# EAGLE board pcbproto- (EAGLE 4.11), part 1 of 4
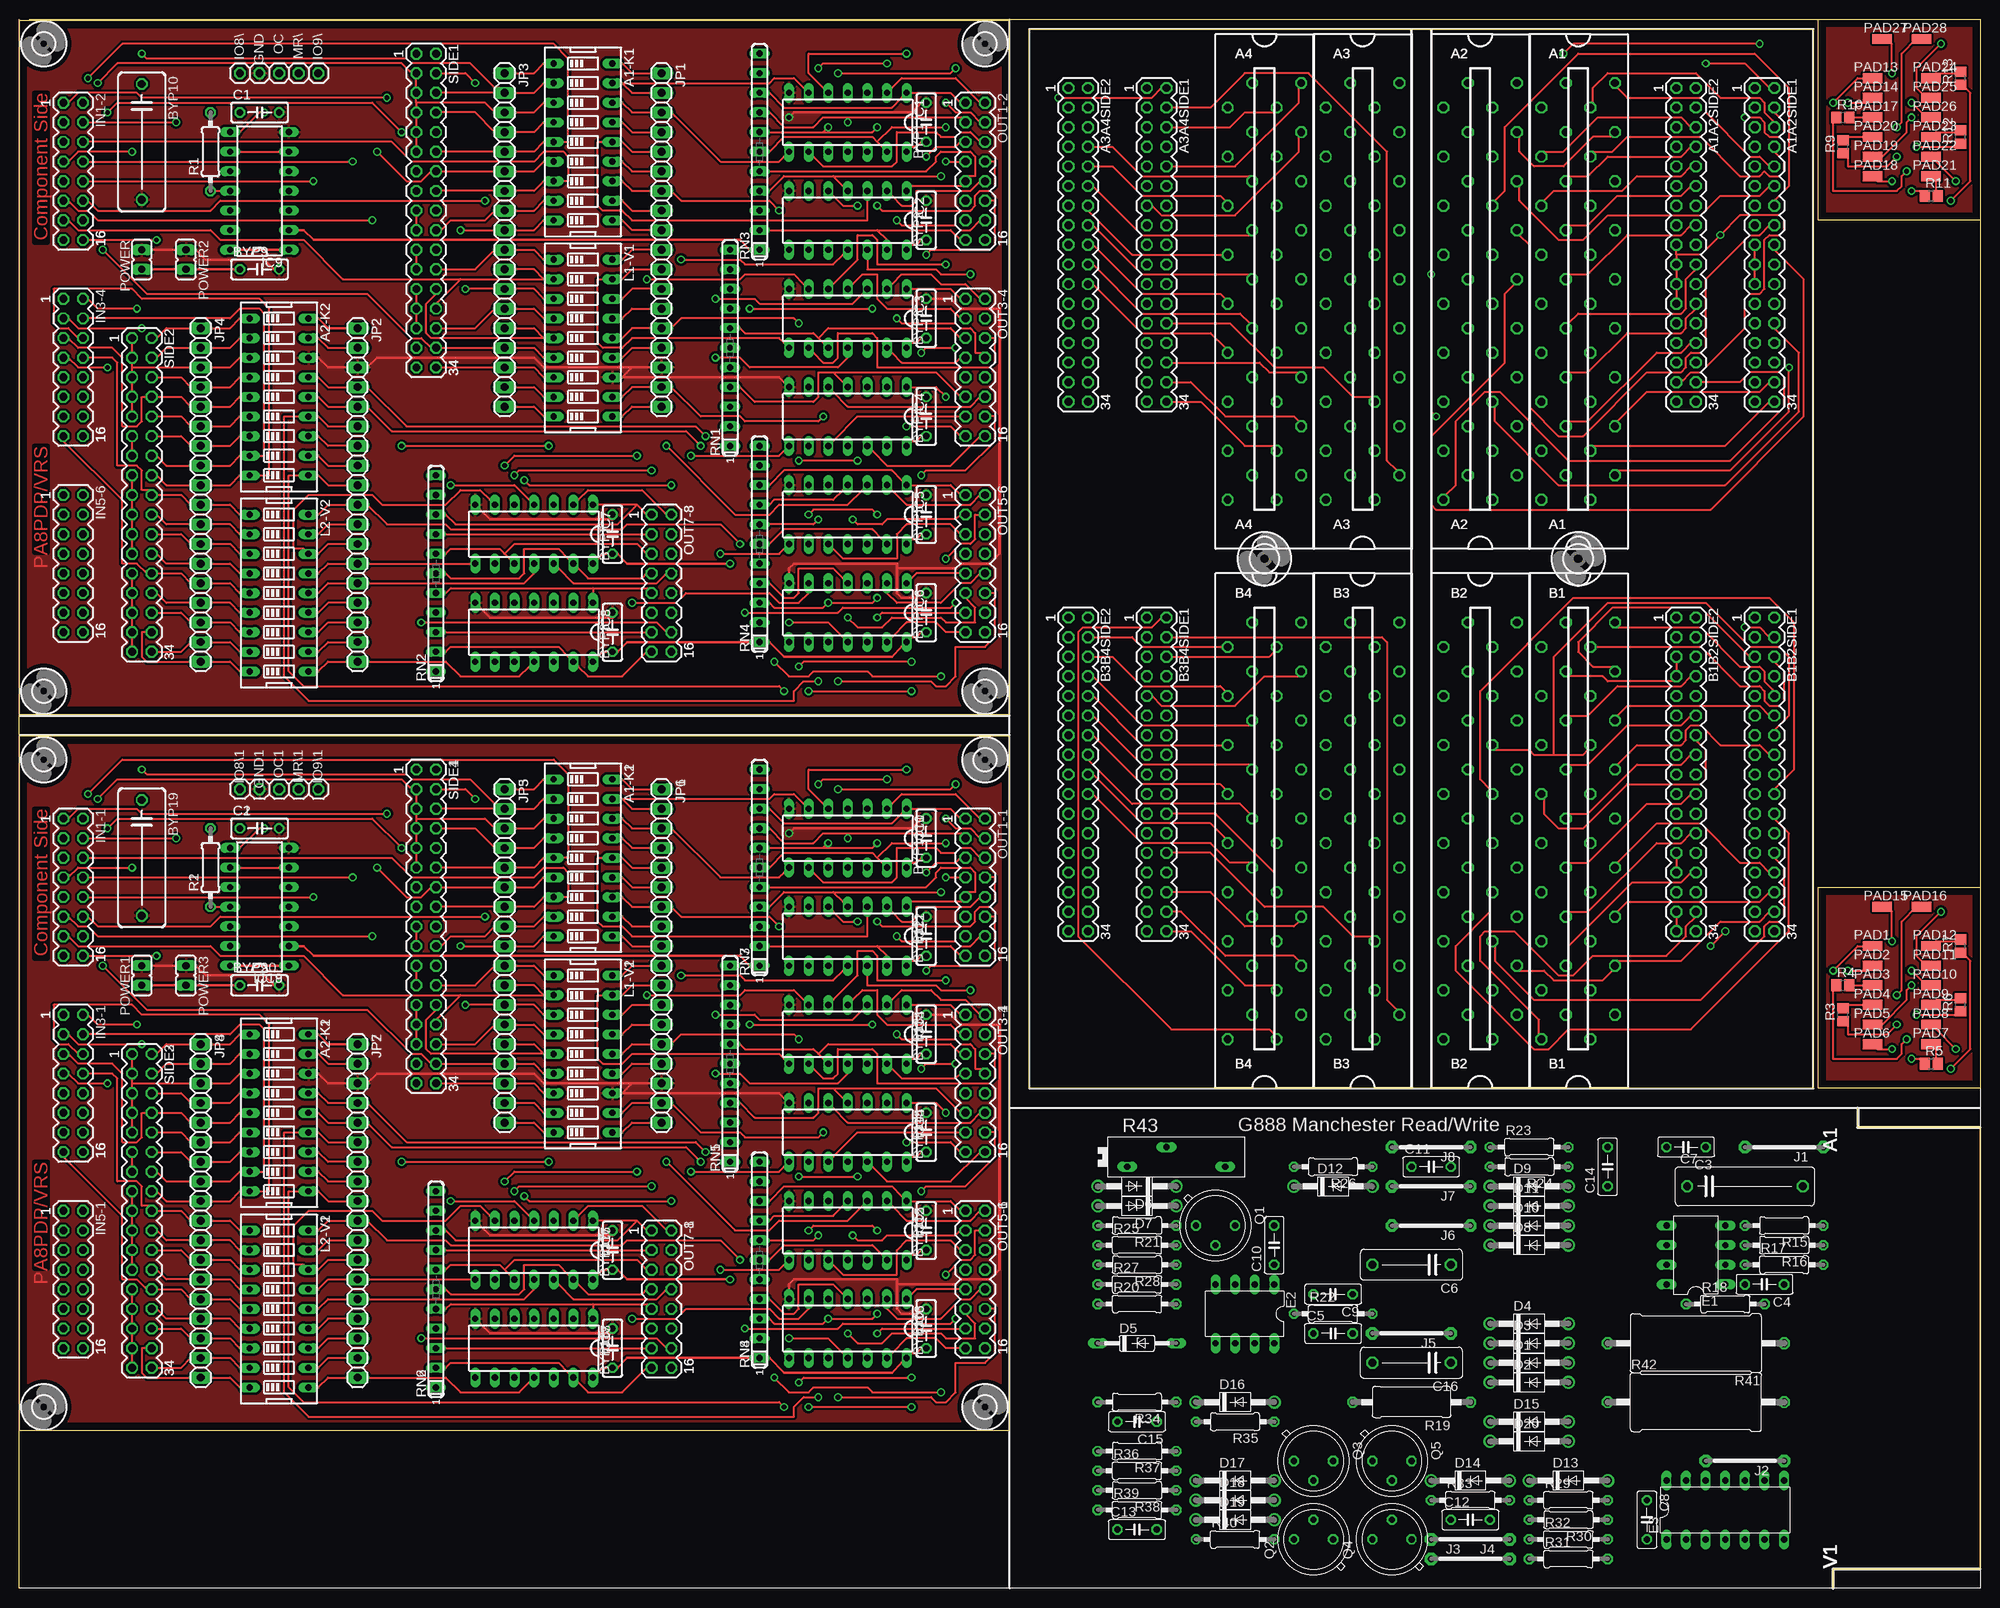
[diagram p0: board, top side]
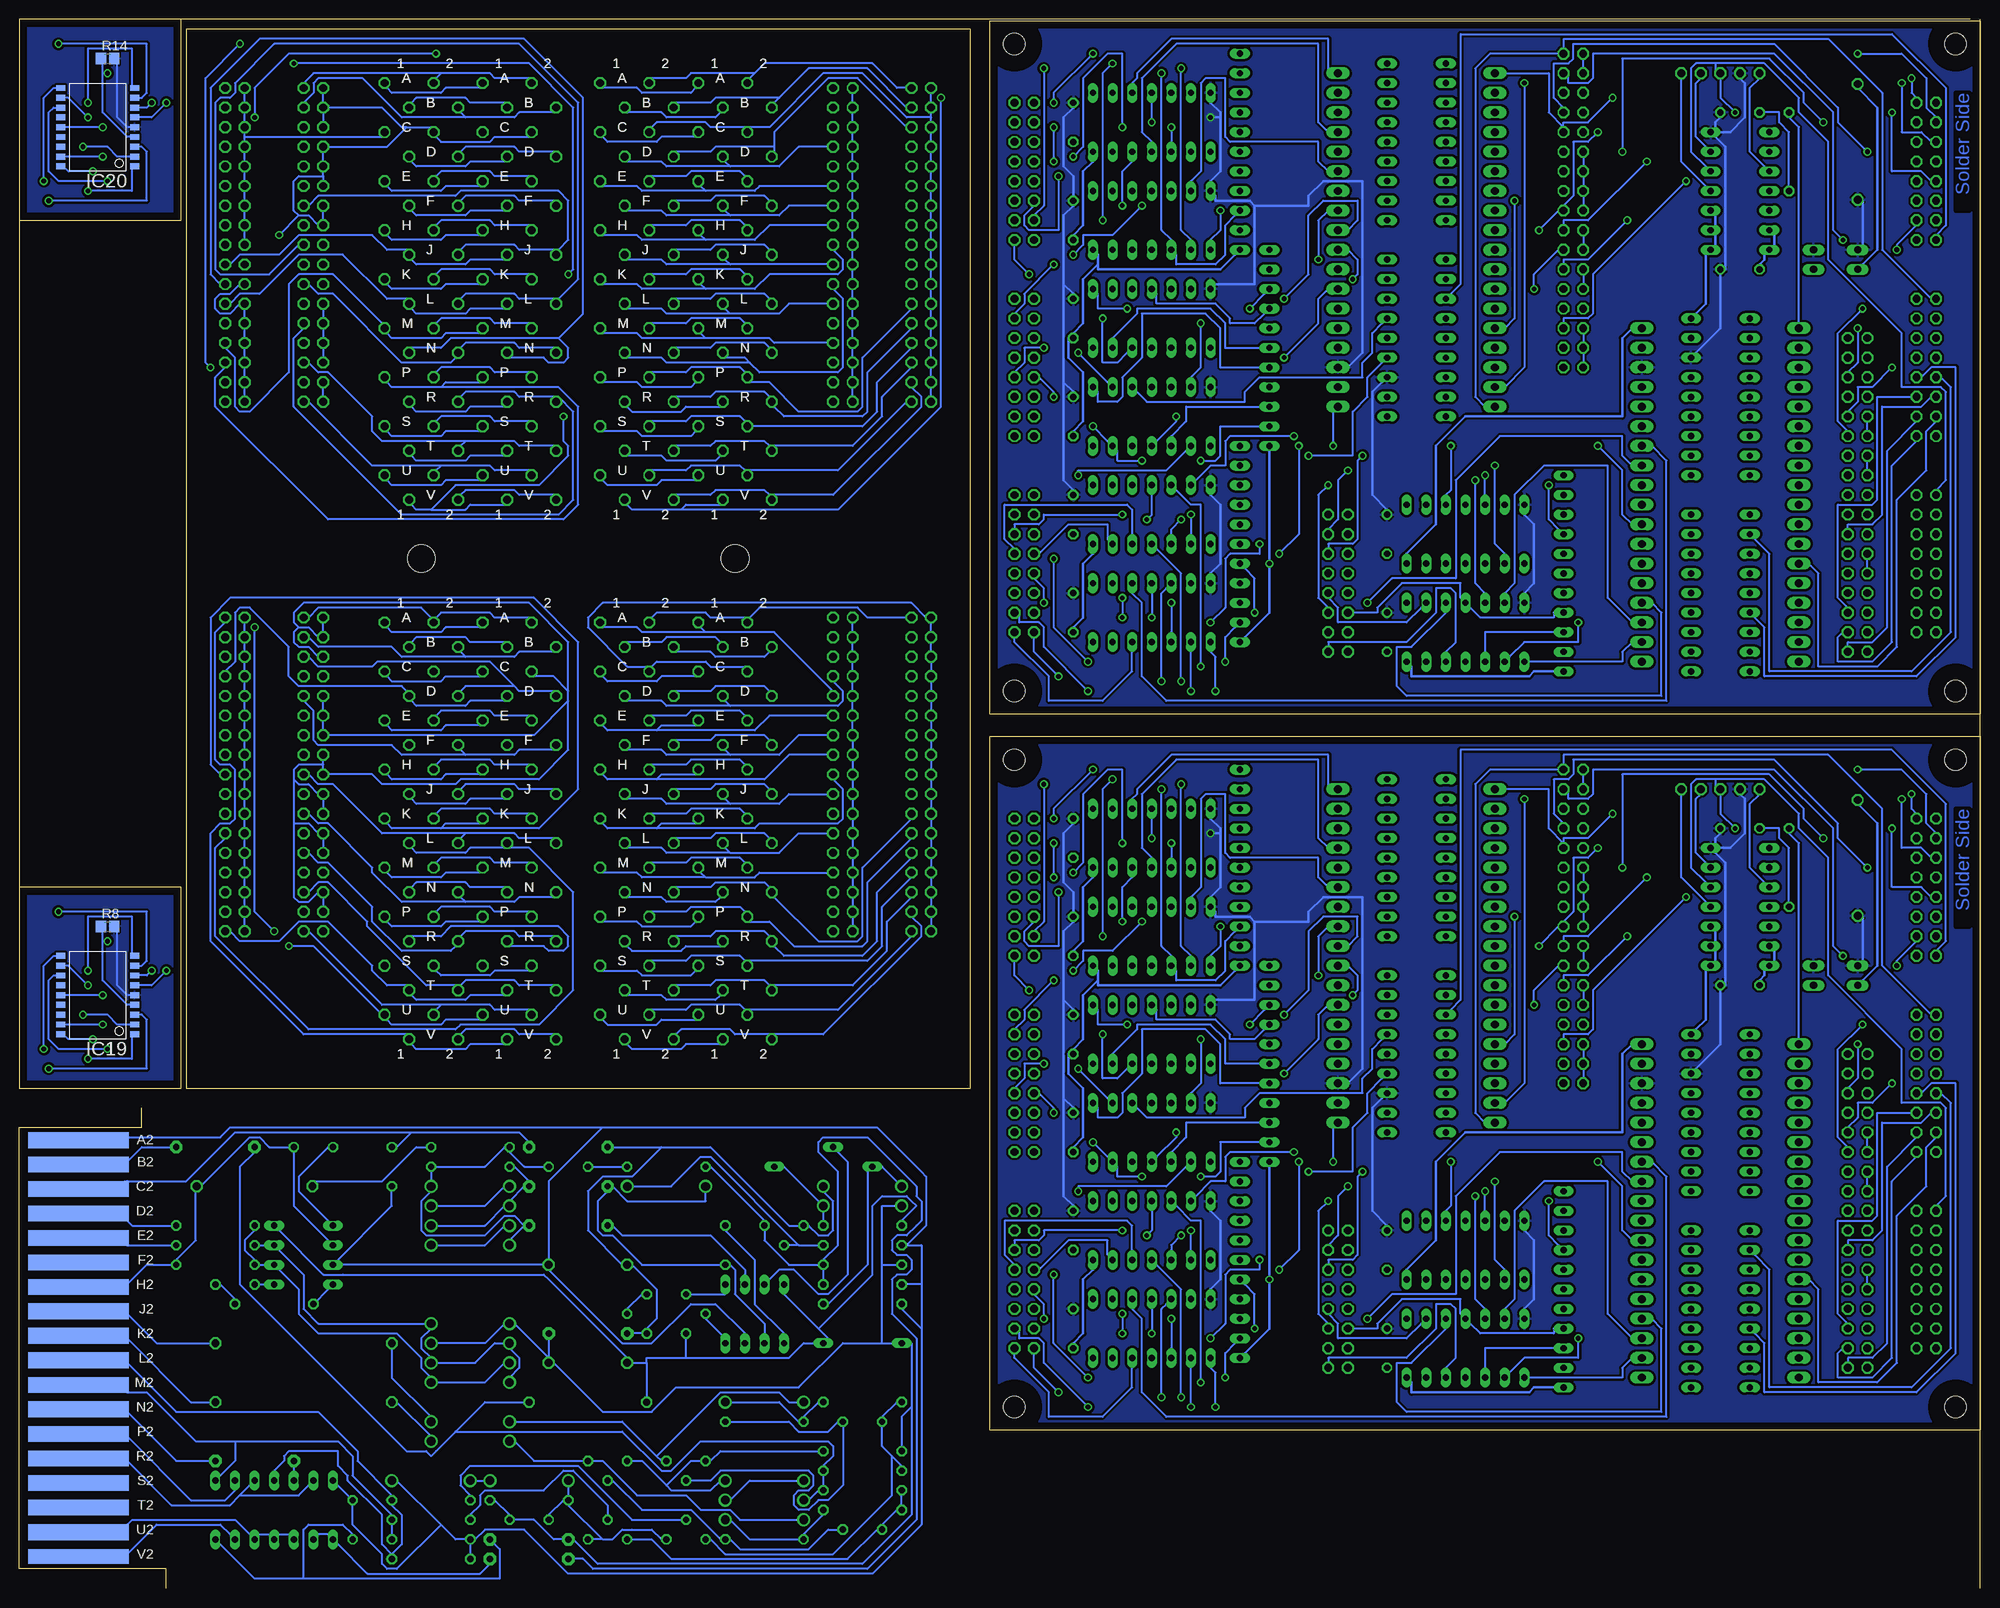
[diagram p1: board, bottom side, seen from below]

Size 254 x 203.2 mm. Coordinates in mm from the lower left corner, seen from the top.
Outline: 128.26,203.03 0.01,203.03
Outline: 0.01,203.03 0.01,113.19
Outline: 0.01,113.19 128.26,113.19
Outline: 128.26,113.19 128.26,203.03
Outline: 1.27,203.2 233.04,203.2
Outline: 233.04,203.2 254,203.2
Outline: 254,203.2 254,177.16
Outline: 254,177.16 254,90.81
Outline: 0,0 0,203.2
Outline: 128.26,110.33 0.01,110.33
Outline: 0.01,110.33 0.01,20.48
Outline: 0.01,20.48 128.26,20.48
Outline: 128.26,20.48 128.26,110.33
Outline: 232.41,64.77 182.88,64.77
Outline: 182.88,64.77 180.34,64.77
Outline: 180.34,64.77 130.81,64.77
Outline: 130.81,64.77 130.81,201.93
Outline: 130.81,201.93 180.34,201.93
Outline: 180.34,201.93 182.88,201.93
Outline: 182.88,201.93 232.41,201.93
Outline: 232.41,201.93 232.41,64.77
Outline: 232.41,64.77 182.88,64.77
Outline: 182.88,64.77 180.34,64.77
Outline: 180.34,64.77 130.81,64.77
Outline: 130.81,64.77 130.81,201.93
Outline: 130.81,201.93 180.34,201.93
Outline: 180.34,201.93 182.88,201.93
Outline: 182.88,201.93 232.41,201.93
Outline: 232.41,201.93 232.41,64.77
Outline: 128.26,203.03 0.01,203.03
Outline: 0.01,203.03 0.01,113.19
Outline: 0.01,113.19 128.26,113.19
Outline: 128.26,113.19 128.26,203.03
Outline: 128.26,110.33 0.01,110.33
Outline: 0.01,110.33 0.01,20.48
Outline: 0.01,20.48 128.26,20.48
Outline: 128.26,20.48 128.26,110.33
Outline: 233.04,64.77 233.04,90.81
Outline: 233.04,90.81 254,90.81
Outline: 254,90.81 254,66.04 254,64.77
Outline: 254,64.77 233.04,64.77
Outline: 233.04,177.16 233.04,203.2
Outline: 233.04,203.2 254,203.2
Outline: 254,203.2 254,179.07 254,177.16
Outline: 254,177.16 233.04,177.16
Outline: 232.41,64.77 182.88,64.77
Outline: 182.88,64.77 180.34,64.77
Outline: 180.34,64.77 130.81,64.77
Outline: 130.81,64.77 130.81,201.93
Outline: 130.81,201.93 180.34,201.93
Outline: 180.34,201.93 182.88,201.93
Outline: 182.88,201.93 232.41,201.93
Outline: 232.41,201.93 232.41,64.77
Outline: 128.26,203.03 0.01,203.03
Outline: 0.01,203.03 0.01,113.19
Outline: 0.01,113.19 128.26,113.19
Outline: 128.26,113.19 128.26,203.03
Outline: 128.26,110.33 0.01,110.33
Outline: 0.01,110.33 0.01,20.48
Outline: 0.01,20.48 128.26,20.48
Outline: 128.26,20.48 128.26,110.33
Outline: 233.04,64.77 233.04,90.81
Outline: 233.04,90.81 254,90.81
Outline: 254,90.81 254,64.77
Outline: 254,64.77 233.04,64.77
Outline: 233.04,177.16 233.04,203.2
Outline: 233.04,203.2 254,203.2
Outline: 254,203.2 254,177.16
Outline: 254,177.16 233.04,177.16
Copper layers (1*16): Top 0.035mm / dielectric 1.5mm / Bottom 0.035mm
Design rules "custompcb": minimum track width 10mil, minimum drill 24mil, track to track 12mil, track to pad 12mil, pad to pad 12mil, via to via 12mil, smd to smd 12mil, copper to edge 40mil, drill to drill 12mil, minimum pad ring 10mil, minimum via ring 8mil, stop-mask expansion 0mil, vias tented up to drill 0mil, thermal gap 10mil
Net classes: 1 Power: width 0.305 mm, drill 0.305 mm

## Footprints (pad centres in the part's own frame; a part is rotated, then mirrored left to right if it is on the bottom)
H807 = drill 1.016 octagon: A1 4.763,28.575; A2 -1.587,28.575; B1 1.587,25.4; B2 -4.763,25.4; C1 4.763,22.225; C2 -1.587,22.225; D1 1.587,19.05; D2 -4.763,19.05; E1 4.763,15.875; E2 -1.587,15.875; F1 1.587,12.7; F2 -4.763,12.7; H1 4.763,9.525; H2 -1.587,9.525; J1 1.587,6.35; J2 -4.763,6.35; K1 4.763,3.175; K2 -1.587,3.175; L1 1.587,0; L2 -4.763,0; M1 4.763,-3.175; M2 -1.587,-3.175; N1 1.587,-6.35; N2 -4.763,-6.35; P1 4.763,-9.525; P2 -1.587,-9.525; R1 1.587,-12.7; R2 -4.763,-12.7; S1 4.763,-15.875; S2 -1.587,-15.875; T1 1.587,-19.05; T2 -4.763,-19.05; U1 4.763,-22.225; U2 -1.587,-22.225; V1 1.587,-25.4; V2 -4.763,-25.4
EDG-09 = drill 0.813 long: 1 -10.16,-3.81; 2 -7.62,-3.81; 3 -5.08,-3.81; 4 -2.54,-3.81; 5 0,-3.81; 6 2.54,-3.81; 7 5.08,-3.81; 8 7.62,-3.81; 9 10.16,-3.81; 10 10.16,3.81; 11 7.62,3.81; 12 5.08,3.81; 13 2.54,3.81; 14 0,3.81; 15 -2.54,3.81; 16 -5.08,3.81; 17 -7.62,3.81; 18 -10.16,3.81
MA17-2 = drill 1.016 octagon: 1 -20.32,-1.27; 2 -20.32,1.27; 3 -17.78,-1.27; 4 -17.78,1.27; 5 -15.24,-1.27; 6 -15.24,1.27; 7 -12.7,-1.27; 8 -12.7,1.27; 9 -10.16,-1.27; 10 -10.16,1.27; 11 -7.62,-1.27; 12 -7.62,1.27; 13 -5.08,-1.27; 14 -5.08,1.27; 15 -2.54,-1.27; 16 -2.54,1.27; 17 0,-1.27; 18 0,1.27; 19 2.54,-1.27; 20 2.54,1.27; 21 5.08,-1.27; 22 5.08,1.27; 23 7.62,-1.27; 24 7.62,1.27; 25 10.16,-1.27; 26 10.16,1.27; 27 12.7,-1.27; 28 12.7,1.27; 29 15.24,-1.27; 30 15.24,1.27; 31 17.78,-1.27; 32 17.78,1.27; 33 20.32,-1.27; 34 20.32,1.27
C050-025X075 = drill 0.813 octagon: 1 -2.54,0; 2 2.54,0
C150-064X183 = drill 1.016 octagon: 1 -7.493,0; 2 7.493,0
C102-043X133 = drill 1.016 octagon: 1 -5.08,0; 2 5.08,0
C150-054X183 = drill 1.016 octagon: 1 -7.493,0; 2 7.493,0
DO41-10 = drill 1.118 round: A 5.08,0; C -5.08,0
DO35Z10 = drill 0.813 long: A 5.08,0; C -5.08,0
DIL08 = drill 0.813 long: 1 -3.81,-3.81; 2 -1.27,-3.81; 3 1.27,-3.81; 4 3.81,-3.81; 5 3.81,3.81; 6 1.27,3.81; 7 -1.27,3.81; 8 -3.81,3.81
DIL14 = drill 0.813 long: 1 -7.62,-3.81; 2 -5.08,-3.81; 3 -2.54,-3.81; 4 0,-3.81; 5 2.54,-3.81; 6 5.08,-3.81; 7 7.62,-3.81; 8 7.62,3.81; 9 5.08,3.81; 10 2.54,3.81; 11 0,3.81; 12 -2.54,3.81; 13 -5.08,3.81; 14 -7.62,3.81
1X01 = drill 1.016 octagon: 1 0,0
SO-18W = smd 0.762 x 1.143: 1 -5.08,-4.788; 2 -3.81,-4.788; 3 -2.54,-4.788; 4 -1.27,-4.788; 5 0,-4.788; 6 1.27,-4.788; 7 2.54,-4.788; 8 3.81,-4.788; 9 5.08,-4.788; 10 5.08,4.788; 11 3.81,4.788; 12 2.54,4.788; 13 1.27,4.788; 14 0,4.788; 15 -1.27,4.788; 16 -2.54,4.788; 17 -3.81,4.788; 18 -5.08,4.788
MA08-2 = drill 1.016 octagon: 1 -8.89,-1.27; 2 -8.89,1.27; 3 -6.35,-1.27; 4 -6.35,1.27; 5 -3.81,-1.27; 6 -3.81,1.27; 7 -1.27,-1.27; 8 -1.27,1.27; 9 1.27,-1.27; 10 1.27,1.27; 11 3.81,-1.27; 12 3.81,1.27; 13 6.35,-1.27; 14 6.35,1.27; 15 8.89,-1.27; 16 8.89,1.27
10 = drill 0.813 pad 1.6 octagon: 1 -5.08,0; 2 5.08,0
1X18 = drill 1.016 long: 1 -21.59,0; 2 -19.05,0; 3 -16.51,0; 4 -13.97,0; 5 -11.43,0; 6 -8.89,0; 7 -6.35,0; 8 -3.81,0; 9 -1.27,0; 10 1.27,0; 11 3.81,0; 12 6.35,0; 13 8.89,0; 14 11.43,0; 15 13.97,0; 16 16.51,0; 17 19.05,0; 18 21.59,0
SMD2 = smd 1.27 x 2.54: 1 0,0
JP1 = drill 0.914 long: 1 0,-1.27; 2 0,1.27
TO39 = drill 0.813 octagon: 1 0,-2.54; 2 2.54,0; 3 0,2.54
0207/10 = drill 0.813 octagon: 1 -5.08,0; 2 5.08,0
R0805 = smd 1.3 x 1.5: 1 -0.85,0; 2 0.85,0
0411/15 = drill 0.914 octagon: 1 -7.62,0; 2 7.62,0
P0817/22 = drill 1.016 octagon: 1 -11.43,0; 2 11.43,0
PT-SPIN = drill 0.813 long: A -6.35,-1.27; E 6.35,-1.27; S -1.27,1.27
SIL11 = drill 0.813 long: 1 -12.7,0; 2 -10.16,0; 3 -7.62,0; 4 -5.08,0; 5 -2.54,0; 6 0,0; 7 2.54,0; 8 5.08,0; 9 7.62,0; 10 10.16,0; 11 12.7,0
2,8 = hole 2.8: 0,0
3,6 = hole 3.6: 0,0
EDGE-CON1 = smd 13.017 x 2.032 bottom: A2 7.69,4.194; B2 7.668,7.328; C2 7.668,10.49; D2 7.693,13.665; E2 7.693,16.84; F2 7.642,20.041; H2 7.642,23.19; J2 7.668,26.34; K2 7.668,29.515; L2 7.693,32.69; M2 7.693,35.89; N2 7.693,39.04; P2 7.668,42.24; R2 7.668,45.39; S2 7.693,48.565; T2 7.693,51.74; U2 7.693,54.966 | smd 13.017 x 1.905 bottom: V2 7.668,58.102

## Placement (x,y rotation side)
A1  [H807]  201.93,166.37 0 top
A1-K1  A1-K1  [EDG-09]  73.03,187.32 270 top
A1-K2  A1-K1  [EDG-09]  73.03,94.61 270 top
A1A2SIDE1  [MA17-2]  226.06,173.99 270 top
A1A2SIDE2  [MA17-2]  215.9,173.99 270 top
A2  [H807]  189.23,166.37 0 top
A2-K1  A2-K2  [EDG-09]  33.66,61.59 270 top
A2-K2  A2-K2  [EDG-09]  33.66,154.31 270 top
A3  [H807]  173.99,166.37 0 top
A3A4SIDE1  [MA17-2]  147.32,173.99 270 top
A3A4SIDE2  [MA17-2]  137.16,173.99 270 top
A4  [H807]  161.29,166.37 0 top
B1  [H807]  201.93,96.52 0 top
B1B2SIDE1  [MA17-2]  226.06,105.41 270 top
B1B2SIDE2  [MA17-2]  215.9,105.41 270 top
B2  [H807]  189.23,96.52 0 top
B3  [H807]  173.99,96.52 0 top
B3B4SIDE1  [MA17-2]  147.32,105.41 270 top
B3B4SIDE2  [MA17-2]  137.16,105.41 270 top
B4  [H807]  161.29,96.52 0 top
BYP1  0.1uf  [C050-025X075]  117.47,189.87 90 top
BYP2  0.1uf  [C050-025X075]  117.47,177.16 90 top
BYP3  0.1uf  [C050-025X075]  117.47,164.47 90 top
BYP4  0.1uf  [C050-025X075]  117.47,151.76 90 top
BYP5  0.1uf  [C050-025X075]  117.47,139.06 90 top
BYP6  0.1uf  [C050-025X075]  117.47,126.36 90 top
BYP7  0.1uf  [C050-025X075]  76.83,136.53 90 top
BYP8  0.1uf  [C050-025X075]  76.83,123.83 90 top
BYP9  0.1uf  [C050-025X075]  31.11,170.81 0 top
BYP10  100uf 25V  [C150-064X183]  15.88,187.32 270 top
BYP11  0.1uf  [C050-025X075]  117.47,97.16 90 top
BYP12  0.1uf  [C050-025X075]  117.47,84.45 90 top
BYP13  0.1uf  [C050-025X075]  117.47,71.75 90 top
BYP14  0.1uf  [C050-025X075]  117.47,59.05 90 top
BYP15  0.1uf  [C050-025X075]  117.47,46.35 90 top
BYP16  0.1uf  [C050-025X075]  117.47,33.66 90 top
BYP17  0.1uf  [C050-025X075]  76.83,43.81 90 top
BYP18  0.1uf  [C050-025X075]  76.83,31.11 90 top
BYP19  100uf 25V  [C150-064X183]  15.88,94.61 270 top
BYP20  0.1uf  [C050-025X075]  31.11,78.11 0 top
C1  0.1uf  [C050-025X075]  31.11,191.13 0 top
C2  0.1uf  [C050-025X075]  31.11,98.42 0 top
C3  .01uf  [C050-025X075]  215.9,57.15 180 top
C4  .22uf  [C050-025X075]  226.06,39.37 180 top
C5  .01uf  [C050-025X075]  170.18,33.02 0 top
C6  6.8uf 35V  [C102-043X133]  180.34,41.91 180 top
C7  .01uf MYLAR 10%  [C150-054X183]  223.52,52.07 0 top
C8  .01uf  [C050-025X075]  210.82,8.89 270 top
C9  .22uf  [C050-025X075]  170.18,38.1 180 top
C10  .01uf  [C050-025X075]  162.56,44.45 90 top
C11  .01uf  [C050-025X075]  182.88,54.61 0 top
C12  .01uf  [C050-025X075]  187.96,8.89 0 top
C13  .1uf  [C050-025X075]  144.78,7.62 0 top
C14  .01uf  [C050-025X075]  205.74,54.61 90 top
C15  .1uf  [C050-025X075]  144.78,21.59 180 top
C16  6.8uf 35V  [C102-043X133]  180.34,29.21 180 top
D1  1N3606  [DO41-10]  195.58,29.21 0 top
D2  1N3606  [DO41-10]  195.58,26.67 0 top
D3  1N3606  [DO41-10]  195.58,31.75 0 top
D4  1N3606  [DO41-10]  195.58,34.29 0 top
D5  1N753A  [DO35Z10]  144.78,31.75 0 top
D6  1N645  [DO41-10]  144.78,52.07 180 top
D7  1N645  [DO41-10]  144.78,49.53 180 top
D8  1N3606  [DO41-10]  195.58,44.45 0 top
D9  1N3606  [DO41-10]  195.58,52.07 0 top
D10  1N3606  [DO41-10]  195.58,46.99 0 top
D11  1N3606  [DO41-10]  195.58,49.53 0 top
D12  1N3606  [DO41-10]  170.18,52.07 0 top
D13  1N645  [DO41-10]  200.66,13.97 0 top
D14  1N645  [DO41-10]  187.96,13.97 0 top
D15  D670  [DO41-10]  195.58,21.59 0 top
D16  D670  [DO41-10]  157.48,24.13 0 top
D17  1N645  [DO41-10]  157.48,13.97 0 top
D18  1N645  [DO41-10]  157.48,11.43 0 top
D19  D670  [DO41-10]  157.48,8.89 0 top
D20  D670  [DO41-10]  195.58,19.05 0 top
E1  MC1709  [DIL08]  217.17,43.18 90 top
E2  MC1709  [DIL08]  158.75,35.56 180 top
E3  7400N  [DIL14]  220.98,10.16 0 top
GND  GND  [1X01]  31.11,196.22 0 top
GND1  GND  [1X01]  31.11,103.5 0 top
IC1  74LS125N  [DIL14]  107.31,189.87 180 top
IC2  74LS125N  [DIL14]  107.31,177.16 180 top
IC3  74LS125N  [DIL14]  107.31,164.47 180 top
IC4  74LS125N  [DIL14]  107.31,151.76 180 top
IC5  74LS125N  [DIL14]  107.31,139.06 180 top
IC6  74LS125N  [DIL14]  107.31,126.36 180 top
IC7  74LS125N  [DIL14]  66.67,136.53 180 top
IC8  74LS125N  [DIL14]  66.67,123.83 180 top
IC9  74LS10N  [DIL14]  31.11,180.97 90 top
IC10  74LS125N  [DIL14]  107.31,97.16 180 top
IC11  74LS125N  [DIL14]  107.31,84.45 180 top
IC12  74LS125N  [DIL14]  107.31,46.35 180 top
IC13  74LS125N  [DIL14]  107.31,33.66 180 top
IC14  74LS125N  [DIL14]  107.31,71.75 180 top
IC15  74LS125N  [DIL14]  107.31,59.05 180 top
IC16  74LS125N  [DIL14]  66.67,43.81 180 top
IC17  74LS125N  [DIL14]  66.67,31.11 180 top
IC18  74LS10N  [DIL14]  31.11,88.27 90 top
IC19  PIC16F627SO  [SO-18W]  243.84,76.83 90 bottom
IC20  PIC16F627SO  [SO-18W]  243.84,189.23 90 bottom
IN1-1  [MA08-2]  6.99,90.81 270 top
IN1-2  [MA08-2]  6.99,183.51 270 top
IN3-1  [MA08-2]  6.99,65.41 270 top
IN3-4  [MA08-2]  6.99,158.12 270 top
IN5-1  [MA08-2]  6.99,40.01 270 top
IN5-6  [MA08-2]  6.99,132.72 270 top
IO8\  IO8\  [1X01]  28.57,196.22 0 top
IO8\1  IO8\  [1X01]  28.57,103.5 0 top
IO9\  IO9\  [1X01]  38.73,196.22 0 top
IO9\1  IO9\  [1X01]  38.73,103.5 0 top
J1  J10MM  [10]  228.6,57.15 180 top
J2  J10MM  [10]  223.52,16.51 180 top
J3  J10MM  [10]  187.96,3.81 0 top
J4  J10MM  [10]  187.96,6.35 180 top
J5  J10MM  [10]  180.34,33.02 180 top
J6  J10MM  [10]  182.88,46.99 180 top
J7  J10MM  [10]  182.88,52.07 180 top
J8  J10MM  [10]  182.88,57.15 180 top
JP1  [1X18]  83.19,174.62 270 top
JP2  [1X18]  43.81,141.6 270 top
JP3  [1X18]  62.87,174.62 270 top
JP4  [1X18]  23.5,141.6 270 top
JP5  [1X18]  62.87,81.92 270 top
JP6  [1X18]  83.19,81.92 270 top
JP7  [1X18]  43.81,48.9 270 top
JP8  [1X18]  23.5,48.9 270 top
L1-V1  L1-V1  [EDG-09]  73.03,161.93 270 top
L1-V2  L1-V1  [EDG-09]  73.03,69.22 270 top
L2-V1  L2-V2  [EDG-09]  33.66,36.2 270 top
L2-V2  L2-V2  [EDG-09]  33.66,128.91 270 top
MR\  MR\  [1X01]  36.2,196.22 0 top
MR\1  MR\  [1X01]  36.2,103.5 0 top
OC  OC  [1X01]  33.66,196.22 0 top
OC1  OC  [1X01]  33.66,103.5 0 top
OUT1-1  [MA08-2]  123.83,90.81 270 top
OUT1-2  [MA08-2]  123.83,183.51 270 top
OUT3-1  [MA08-2]  123.83,65.41 270 top
OUT3-4  [MA08-2]  123.83,158.12 270 top
OUT5-1  [MA08-2]  123.83,40.01 270 top
OUT5-6  [MA08-2]  123.83,132.72 270 top
OUT7-1  [MA08-2]  83.19,37.47 270 top
OUT7-8  [MA08-2]  83.19,130.18 270 top
PAD1  [SMD2]  240.03,83.19 270 top
PAD2  [SMD2]  240.03,80.64 270 top
PAD3  [SMD2]  240.03,78.11 270 top
PAD4  [SMD2]  240.03,75.56 270 top
PAD5  [SMD2]  240.03,73.03 270 top
PAD6  [SMD2]  240.03,70.48 270 top
PAD7  [SMD2]  247.65,70.48 270 top
PAD8  [SMD2]  247.65,73.03 270 top
PAD9  [SMD2]  247.65,75.56 270 top
PAD10  [SMD2]  247.65,78.11 270 top
PAD11  [SMD2]  247.65,80.64 270 top
PAD12  [SMD2]  247.65,83.19 270 top
PAD13  [SMD2]  240.03,195.58 270 top
PAD14  [SMD2]  240.03,193.04 270 top
PAD15  [SMD2]  241.3,88.27 270 top
PAD16  [SMD2]  246.38,88.27 270 top
PAD17  [SMD2]  240.03,190.5 270 top
PAD18  [SMD2]  240.03,182.88 270 top
PAD19  [SMD2]  240.03,185.42 270 top
PAD20  [SMD2]  240.03,187.96 270 top
PAD21  [SMD2]  247.65,182.88 270 top
PAD22  [SMD2]  247.65,185.42 270 top
PAD23  [SMD2]  247.65,187.96 270 top
PAD24  [SMD2]  247.65,195.58 270 top
PAD25  [SMD2]  247.65,193.04 270 top
PAD26  [SMD2]  247.65,190.5 270 top
PAD27  [SMD2]  241.3,200.66 270 top
PAD28  [SMD2]  246.38,200.66 270 top
POWER  POWER  [JP1]  15.88,172.09 180 top
POWER1  POWER  [JP1]  15.88,79.38 180 top
POWER2  POWER  [JP1]  21.59,172.09 180 top
POWER3  POWER  [JP1]  21.59,79.38 180 top
Q1  2n3009B  [TO39]  154.94,46.99 270 top
Q2  MPS6534  [TO39]  167.64,6.35 90 top
Q3  MM1008  [TO39]  167.64,16.51 270 top
Q4  MPS6534  [TO39]  177.8,6.35 90 top
Q5  MM1008  [TO39]  177.8,16.51 270 top
R1  1K  [0207/10]  24.77,186.06 90 top
R2  1K  [0207/10]  24.77,93.34 90 top
R3  [R0805]  236.22,74.3 90 top
R4  [R0805]  236.22,78.11 0 top
R5  [R0805]  247.65,67.94 0 top
R6  [R0805]  251.46,75.56 90 top
R7  [R0805]  251.46,83.19 90 top
R8  [R0805]  242.57,85.72 0 bottom
R9  [R0805]  236.22,186.69 90 top
R10  [R0805]  236.22,190.5 0 top
R11  [R0805]  247.65,180.34 0 top
R12  [R0805]  251.46,187.96 90 top
R13  [R0805]  251.46,195.58 90 top
R14  [R0805]  242.57,198.12 0 bottom
R15  220  [0207/10]  228.6,46.99 180 top
R16  220  [0207/10]  228.6,44.45 180 top
R17  22K  [0207/10]  228.6,41.91 0 top
R18  1.5K  [0207/10]  220.98,36.83 0 top
R19  330 1/2W  [0411/15]  180.34,24.13 180 top
R20  1K  [0207/10]  144.78,36.83 0 top
R21  1K  [0207/10]  144.78,46.99 180 top
R22  1.5K  [0207/10]  170.18,35.56 0 top
R23  4.7K  [0207/10]  195.58,57.15 0 top
R24  470K  [0207/10]  195.58,54.61 180 top
R25  4.7K  [0207/10]  144.78,44.45 0 top
R26  470K  [0207/10]  170.18,54.61 180 top
R27  1K  [0207/10]  144.78,39.37 0 top
R28  3K  [0207/10]  144.78,41.91 180 top
R29  470  [0207/10]  200.66,11.43 0 top
R30  470  [0207/10]  200.66,8.89 180 top
R31  1K  [0207/10]  200.66,3.81 0 top
R32  1K  [0207/10]  200.66,6.35 0 top
R33  470  [0207/10]  187.96,11.43 0 top
R34  750  [0207/10]  144.78,24.13 180 top
R35  560  [0207/10]  157.48,21.59 180 top
R36  1K  [0207/10]  144.78,15.24 0 top
R37  1K  [0207/10]  144.78,17.78 180 top
R38  1K  [0207/10]  144.78,12.7 180 top
R39  750  [0207/10]  144.78,10.16 0 top
R40  560  [0207/10]  157.48,6.35 0 top
R41  68 2W  [P0817/22]  217.17,31.75 180 top
R42  68 2W  [P0817/22]  217.17,24.13 0 top
R43  5K  [PT-SPIN]  149.86,55.88 0 top
RN1  [SIL11]  92.08,160.66 90 top
RN2  [SIL11]  53.98,131.44 90 top
RN3  [SIL11]  95.89,186.06 90 top
RN4  [SIL11]  95.89,135.25 90 top
RN5  [SIL11]  92.08,67.94 90 top
RN6  [SIL11]  53.98,38.73 90 top
RN7  [SIL11]  95.89,93.34 90 top
RN8  [SIL11]  95.89,42.55 90 top
SIDE1  [MA17-2]  52.7,178.44 270 top
SIDE2  [MA17-2]  15.88,141.6 270 top
SIDE3  [MA17-2]  15.88,48.9 270 top
SIDE4  [MA17-2]  52.7,85.72 270 top
U$1  [2,8]  3.17,200.03 180 top
U$2  [2,8]  3.17,116.2 180 top
U$3  [2,8]  125.09,116.2 180 top
U$4  [2,8]  125.09,200.03 180 top
U$5  [3,6]  161.29,133.35 0 top
U$6  [3,6]  201.93,133.35 0 top
U$7  [2,8]  3.17,107.31 180 top
U$8  [2,8]  3.17,23.5 180 top
U$9  [2,8]  125.09,23.5 180 top
U$10  [2,8]  125.09,107.31 180 top
U$11  EDGE-1  [EDGE-CON1]  254,62.23 180 top

## Library data of the parts
A1-A4 B1-B4 = dec-m
A1-K1 A1-K2 A2-K1 A2-K2 L1-V1 L1-V2 L2-V1 L2-V2 = special
A1A2SIDE1 A1A2SIDE2 A3A4SIDE1 A3A4SIDE2 B1B2SIDE1 B1B2SIDE2 B3B4SIDE1 B3B4SIDE2 IN1-1 IN1-2 IN3-1 IN3-4 IN5-1 IN5-6 OUT1-1 OUT1-2 OUT3-1 OUT3-4 OUT5-1 OUT5-6 OUT7-1 OUT7-8 SIDE1-SIDE4 = con-lstb
BYP1-BYP20 C1-C16 R1-R42 = rcl
D1-D20 = diode
E1 E2 = linear
E3 = 74xx-us
GND GND1 IO8\ IO8\1 IO9\ IO9\1 JP1-JP8 MR\ MR\1 OC OC1 = pinhead
IC1-IC18 = 74xx-jameco
IC19 IC20 = microchip
J1-J8 POWER POWER1-POWER3 = jumper
PAD1-PAD28 = wirepad
Q1 Q3 Q5 = transistor-npn
Q2 Q4 = transistor-pnp
R43 = pot
RN1-RN8 = resistor-sil
U$1-U$10 = holes
U$11 = dec-con

## Nets
-15V: D18.C J1.2 R19.1 R36.2 R38.1
A1: A1-K1.1 IN1-2.1 JP3.1 SIDE1.10
A2: A2-K2.1 JP4.1 R1.2 SIDE2.2
A3: A1-K2.1 IN1-1.1 JP5.1 SIDE4.10
A4: A2-K1.1 JP8.1 R2.2 SIDE3.2
B1: A1-K1.2 IN1-2.3 JP3.2 SIDE1.6
B2: A2-K2.2 JP4.2 SIDE2.4
B3: A1-K2.2 IN1-1.3 JP5.2 SIDE4.6
B4: A2-K1.2 JP8.2 SIDE3.4
C1: A1-K1.3 IN1-2.5 JP3.3 SIDE1.1 SIDE1.3 SIDE1.5 SIDE1.7 SIDE1.9 SIDE1.11 SIDE1.13 SIDE1.15 SIDE1.17 SIDE1.19 SIDE1.21 SIDE1.23 SIDE1.25 SIDE1.27 SIDE1.29 SIDE1.31 SIDE1.33
C1\: IC19.17 R3.1
C1\1: IC20.17 R9.1
C2: A2-K2.3 JP4.3 SIDE2.1 SIDE2.3 SIDE2.5 SIDE2.7 SIDE2.9 SIDE2.11 SIDE2.13 SIDE2.15 SIDE2.17 SIDE2.19 SIDE2.21 SIDE2.23 SIDE2.25 SIDE2.27 SIDE2.29 SIDE2.31 SIDE2.33
C2\: IC19.18 R4.1
C2\1: IC20.18 R10.1
C3: A1-K2.3 IN1-1.5 JP5.3 SIDE4.1 SIDE4.3 SIDE4.5 SIDE4.7 SIDE4.9 SIDE4.11 SIDE4.13 SIDE4.15 SIDE4.17 SIDE4.19 SIDE4.21 SIDE4.23 SIDE4.25 SIDE4.27 SIDE4.29 SIDE4.31 SIDE4.33
C3\: IC19.1 R5.1
C3\1: IC20.1 R11.1
C4: A2-K1.3 JP8.3 SIDE3.1 SIDE3.3 SIDE3.5 SIDE3.7 SIDE3.9 SIDE3.11 SIDE3.13 SIDE3.15 SIDE3.17 SIDE3.19 SIDE3.21 SIDE3.23 SIDE3.25 SIDE3.27 SIDE3.29 SIDE3.31 SIDE3.33
C4\: IC19.2 R6.1
C4\1: IC20.2 R12.1
C5\: IC19.3 R7.1
C5\1: IC20.3 R13.1
COL1\: PAD4.1 R3.2
COL1\1: PAD20.1 R9.2
COL2\: PAD3.1 R4.2
COL2\1: PAD17.1 R10.2
COL3\: PAD7.1 R5.2
COL3\1: PAD21.1 R11.2
COL4\: PAD9.1 R6.2
COL4\1: PAD23.1 R12.2
COL5\: PAD12.1 R7.2
COL5\1: PAD24.1 R13.2
D: R15.1 U$11.D2
D1: A1-K1.4 IN1-2.7 JP3.4 SIDE1.8
D2: A2-K2.4 IN3-4.3 JP4.4 SIDE2.6
D3: A1-K2.4 IN1-1.7 JP5.4 SIDE4.8
D4: A2-K1.4 IN3-1.3 JP8.4 SIDE3.6
E: R16.1 U$11.E2
E1: A1-K1.5 IN1-2.2 JP3.5 SIDE1.12
E2: A2-K2.5 IN3-4.5 JP4.5 SIDE2.8
E3: A1-K2.5 IN1-1.2 JP5.5 SIDE4.12
E4: A2-K1.5 IN3-1.5 JP8.5 SIDE3.8
F1: A1-K1.6 IN1-2.4 JP3.6 SIDE1.14
F2: A2-K2.6 IN3-4.7 JP4.6 SIDE2.10
F3: A2-K1.6 IN3-1.7 JP8.6 SIDE3.10
F4: A1-K2.6 IN1-1.4 JP5.6 SIDE4.14
GND [Power]: A2-K2.16 BYP1.2 BYP2.2 BYP3.2 BYP4.2 BYP5.2 BYP6.2 BYP7.2 BYP8.2 BYP9.2 BYP10.2 C1.2 GND.1 IC1.7 IC2.7 IC3.7 IC4.7 IC5.7 IC6.7 IC7.7 IC8.7 IC9.7 JP1.16 JP2.3 L1-V1.12 POWER2.1 POWER.1
GND1 [Power]: A2-K1.16 BYP11.2 BYP12.2 BYP13.2 BYP14.2 BYP15.2 BYP16.2 BYP17.2 BYP18.2 BYP19.2 BYP20.2 C2.2 GND1.1 IC10.7 IC11.7 IC12.7 IC13.7 IC14.7 IC15.7 IC16.7 IC17.7 IC18.7 JP6.16 JP7.3 L1-V2.12 POWER1.1 POWER3.1
GND2: IC19.5 R8.2
GND3: IC20.5 R14.2
GND4: C5.2 C6.2 C8.2 C12.2 C14.2 C16.1 D3.A D4.C D5.C D6.C D7.A E3.7 J4.1 J4.2 J5.1 J5.2 J8.1 J8.2 Q1.1 R28.2 R33.2 R37.2 U$11.C2
H: C3.1 C7.2 E1.6 R17.2 U$11.H2
H1: A1-K1.7 IN1-2.6 JP3.7 SIDE1.16
H2: A2-K2.7 IN3-4.2 JP4.7 SIDE2.12
H3: A1-K2.7 IN1-1.6 JP5.7 SIDE4.16
H4: A2-K1.7 IN3-1.2 JP8.7 SIDE3.12
IO8\: IC9.10 IO8\.1
IO8\1: IC18.10 IO8\1.1
IO9\: IC9.4 IO9\.1
IO9\1: IC18.4 IO9\1.1
J: R41.1 U$11.J2
J1: A1-K1.8 IN1-2.8 JP3.8 SIDE1.20
J2: A2-K2.8 IN3-4.4 JP4.8 SIDE2.14
J3: A1-K2.8 IN1-1.8 JP5.8 SIDE4.20
J4: A2-K1.8 IN3-1.4 JP8.8 SIDE3.14
K: R42.2 U$11.K2
K1: A1-K1.9 IN1-2.9 JP3.9 SIDE1.18
K2: A2-K2.9 IN3-4.6 JP4.9 SIDE2.16
K3: A2-K1.9 IN3-1.6 JP8.9 SIDE3.16
K4: A1-K2.9 IN1-1.9 JP5.9 SIDE4.18
L: E3.11 R29.2 R31.2 U$11.L2
L1: IN1-2.11 JP3.10 L1-V1.1 SIDE1.24
L2: IN3-4.8 JP4.10 L2-V2.1 SIDE2.18
L3: IN1-1.11 JP5.10 L1-V2.1 SIDE4.24
L4: IN3-1.8 JP8.10 L2-V1.1 SIDE3.18
M: E3.8 R30.1 R32.2 U$11.M2
M1: IN1-2.13 JP3.11 L1-V1.2 SIDE1.28
M2: IN3-4.9 JP4.11 L2-V2.2 SIDE2.20
M3: IN1-1.13 JP5.11 L1-V2.2 SIDE4.28
M4: IN3-1.9 JP8.11 L2-V1.2 SIDE3.20
MR\: IC9.6 IC9.9 MR\.1
MR\1: IC18.6 IC18.9 MR\1.1
N: J2.1 U$11.N2
N1: IN1-2.15 JP3.12 L1-V1.3 SIDE1.22
N2: IN3-4.11 JP4.12 L2-V2.3 SIDE2.22
N3: IN3-1.11 JP8.12 L2-V1.3 SIDE3.22
N4: IN1-1.15 JP5.12 L1-V2.3 SIDE4.22
N$1: B1.C2 B1B2SIDE2.1 B1B2SIDE2.3 B1B2SIDE2.5 B1B2SIDE2.7 B1B2SIDE2.9 B1B2SIDE2.11 B1B2SIDE2.13 B1B2SIDE2.15 B1B2SIDE2.17 B1B2SIDE2.19 B1B2SIDE2.21 B1B2SIDE2.23 B1B2SIDE2.25 B1B2SIDE2.27 B1B2SIDE2.29 B1B2SIDE2.31 B1B2SIDE2.33 B2.C2
N$2: B1.A2 B1B2SIDE2.2 B2.A2
N$3: B1.B2 B1B2SIDE2.4 B2.B2
N$4: B1.D2 B1B2SIDE2.6 B2.D2
N$5: B1.E2 B1B2SIDE2.8 B2.E2
N$6: B1.F2 B1B2SIDE2.10 B2.F2
N$7: B1.H2 B1B2SIDE2.12 B2.H2
N$8: B1.J2 B1B2SIDE2.14 B2.J2
N$9: B1.K2 B1B2SIDE2.16 B2.K2
N$10: B1.L2 B1B2SIDE2.18 B2.L2
N$11: B1.M2 B1B2SIDE2.20 B2.M2
N$12: B1.N2 B1B2SIDE2.22 B2.N2
N$13: B1.P2 B1B2SIDE2.24 B2.P2
N$14: B1.R2 B1B2SIDE2.26 B2.R2
N$15: B1.S2 B1B2SIDE2.28 B2.S2
N$16: B1.T2 B1B2SIDE2.30 B2.T2
N$17: B1.U2 B1B2SIDE2.34 B2.U2
N$18: B1.V2 B1B2SIDE2.32 B2.V2
N$19: B1.A1 B1B2SIDE1.10 B2.A1
N$20: B1.B1 B1B2SIDE1.6 B2.B1
N$21: B1.D1 B1B2SIDE1.8 B2.D1
N$22: B1.E1 B1B2SIDE1.12 B2.E1
N$23: B1.F1 B1B2SIDE1.14 B2.F1
N$24: B1.H1 B1B2SIDE1.16 B2.H1
N$25: B1.J1 B1B2SIDE1.20 B2.J1
N$26: B1.K1 B1B2SIDE1.18 B2.K1
N$27: B1.L1 B1B2SIDE1.24 B2.L1
N$28: B1.M1 B1B2SIDE1.28 B2.M1
N$29: B1.N1 B1B2SIDE1.22 B2.N1
N$30: B1.P1 B1B2SIDE1.30 B2.P1
N$31: B1.R1 B1B2SIDE1.26 B2.R1
N$32: B1.S1 B1B2SIDE1.32 B2.S1
N$33: B1.T1 B1B2SIDE1.34 B2.T1
N$34: B1.U1 B1B2SIDE1.4 B2.U1
N$35: B1.V1 B1B2SIDE1.2 B2.V1
N$36: B1.C1 B1B2SIDE1.1 B1B2SIDE1.3 B1B2SIDE1.5 B1B2SIDE1.7 B1B2SIDE1.9 B1B2SIDE1.11 B1B2SIDE1.13 B1B2SIDE1.15 B1B2SIDE1.17 B1B2SIDE1.19 B1B2SIDE1.21 B1B2SIDE1.23 B1B2SIDE1.25 B1B2SIDE1.27 B1B2SIDE1.29 B1B2SIDE1.31 B1B2SIDE1.33 B2.C1
N$37: A1.C2 A1A2SIDE2.1 A1A2SIDE2.3 A1A2SIDE2.5 A1A2SIDE2.7 A1A2SIDE2.9 A1A2SIDE2.11 A1A2SIDE2.13 A1A2SIDE2.15 A1A2SIDE2.17 A1A2SIDE2.19 A1A2SIDE2.21 A1A2SIDE2.23 A1A2SIDE2.25 A1A2SIDE2.27 A1A2SIDE2.29 A1A2SIDE2.31 A1A2SIDE2.33 A2.C2
N$38: A1.A2 A1A2SIDE2.2 A2.A2
N$39: A1.B2 A1A2SIDE2.4 A2.B2
N$40: A1.D2 A1A2SIDE2.6 A2.D2
N$41: A1.E2 A1A2SIDE2.8 A2.E2
N$42: A1.F2 A1A2SIDE2.10 A2.F2
N$43: A1.H2 A1A2SIDE2.12 A2.H2
N$44: A1.J2 A1A2SIDE2.14 A2.J2
N$45: A1.K2 A1A2SIDE2.16 A2.K2
N$46: A1.L2 A1A2SIDE2.18 A2.L2
N$47: A1.M2 A1A2SIDE2.20 A2.M2
N$48: A1.N2 A1A2SIDE2.22 A2.N2
N$49: A1.P2 A1A2SIDE2.24 A2.P2
N$50: A1.R2 A1A2SIDE2.26 A2.R2
N$51: A1.S2 A1A2SIDE2.28 A2.S2
N$52: A1.T2 A1A2SIDE2.30 A2.T2
N$53: A1.U2 A1A2SIDE2.34 A2.U2
N$54: A1.V2 A1A2SIDE2.32 A2.V2
N$55: A1.A1 A1A2SIDE1.10 A2.A1
N$56: A1.B1 A1A2SIDE1.6 A2.B1
N$57: A1.D1 A1A2SIDE1.8 A2.D1
N$58: A1.E1 A1A2SIDE1.12 A2.E1
N$59: A1.F1 A1A2SIDE1.14 A2.F1
N$60: A1.H1 A1A2SIDE1.16 A2.H1
N$61: A1.J1 A1A2SIDE1.20 A2.J1
N$62: A1.K1 A1A2SIDE1.18 A2.K1
N$63: A1.L1 A1A2SIDE1.24 A2.L1
N$64: A1.M1 A1A2SIDE1.28 A2.M1
N$65: A1.N1 A1A2SIDE1.22 A2.N1
N$66: A1.P1 A1A2SIDE1.30 A2.P1
N$67: A1.R1 A1A2SIDE1.26 A2.R1
N$68: A1.S1 A1A2SIDE1.32 A2.S1
N$69: A1.T1 A1A2SIDE1.34 A2.T1
N$70: A1.U1 A1A2SIDE1.4 A2.U1
N$71: A1.V1 A1A2SIDE1.2 A2.V1
N$72: A1.C1 A1A2SIDE1.1 A1A2SIDE1.3 A1A2SIDE1.5 A1A2SIDE1.7 A1A2SIDE1.9 A1A2SIDE1.11 A1A2SIDE1.13 A1A2SIDE1.15 A1A2SIDE1.17 A1A2SIDE1.19 A1A2SIDE1.21 A1A2SIDE1.23 A1A2SIDE1.25 A1A2SIDE1.27 A1A2SIDE1.29 A1A2SIDE1.31 A1A2SIDE1.33 A2.C1
N$73: IC1.4 OUT1-2.3 RN3.8
N$74: IC1.13 OUT1-2.7 RN3.6
N$75: IC1.2 OUT1-2.2
N$76: IC1.5 OUT1-2.4
N$77: IC1.9 OUT1-2.6
N$78: IC1.12 OUT1-2.8
N$79: IC2.10 OUT1-2.13 RN3.3
N$80: IC2.4 OUT1-2.11 RN3.4
N$81: IC2.1 OUT1-2.9 RN3.5
N$82: IC2.2 OUT1-2.10
N$83: IC2.9 OUT1-2.14
N$84: IC2.12 OUT1-2.16
N$85: IC1.1 OUT1-2.1 RN3.9
N$86: IC1.10 OUT1-2.5 RN3.7
N$87: IC2.5 OUT1-2.12
N$88: IC5.4 OUT5-6.3 RN4.8
N$89: IC6.4 OUT5-6.11 RN4.4
N$90: IC6.1 OUT5-6.9 RN4.5
N$91: IC6.2 OUT5-6.10
N$92: IC6.9 OUT5-6.14
N$93: IC6.12 OUT5-6.16
N$94: IC5.1 OUT5-6.1 RN4.9
N$95: IC5.10 OUT5-6.5 RN4.7
N$96: IC6.5 OUT5-6.12
N$97: IC6.13 OUT5-6.15 RN4.2
N$98: IC3.4 OUT3-4.3 RN1.8
N$99: IC3.13 OUT3-4.7 RN1.6
N$100: IC3.2 OUT3-4.2
N$101: IC3.5 OUT3-4.4
N$102: IC3.9 OUT3-4.6
N$103: IC3.12 OUT3-4.8
N$104: IC4.10 OUT3-4.13 RN1.3
N$105: IC4.4 OUT3-4.11 RN1.4
N$106: IC4.1 OUT3-4.9 RN1.5
N$107: IC4.2 OUT3-4.10
N$108: IC4.9 OUT3-4.14
N$109: IC4.12 OUT3-4.16
N$110: IC3.1 OUT3-4.1 RN1.9
N$111: IC3.10 OUT3-4.5 RN1.7
N$112: IC4.5 OUT3-4.12
N$113: IC4.13 OUT3-4.15 RN1.2
N$114: IC7.4 OUT7-8.3 RN2.8
N$115: IC7.13 OUT7-8.7 RN2.6
N$116: IC7.2 OUT7-8.2
N$117: IC7.5 OUT7-8.4
N$118: IC7.9 OUT7-8.6
N$119: IC7.12 OUT7-8.8
N$120: IC8.10 OUT7-8.13 RN2.3
N$121: IC8.4 OUT7-8.11 RN2.4
N$122: IC8.1 OUT7-8.9 RN2.5
N$123: IC8.2 OUT7-8.10
N$124: IC8.9 OUT7-8.14
N$125: C1.1 IC9.11 R1.1
N$126: IC10.4 OUT1-1.3 RN7.8
N$127: IC10.13 OUT1-1.7 RN7.6
N$128: IC10.2 OUT1-1.2
N$129: IC10.5 OUT1-1.4
N$130: IC10.9 OUT1-1.6
N$131: IC10.12 OUT1-1.8
N$132: IC11.10 OUT1-1.13 RN7.3
N$133: IC11.4 OUT1-1.11 RN7.4
N$134: IC11.1 OUT1-1.9 RN7.5
N$135: IC11.2 OUT1-1.10
N$136: IC11.9 OUT1-1.14
N$137: IC11.12 OUT1-1.16
N$138: IC5.13 OUT5-6.7 RN4.6
N$139: IC2.13 OUT1-2.15 RN3.2
N$140: IC5.2 OUT5-6.2
N$141: IC5.5 OUT5-6.4
N$142: IC5.9 OUT5-6.6
N$143: IC5.12 OUT5-6.8
N$144: IC6.10 OUT5-6.13 RN4.3
N$145: A3.C2 A3A4SIDE2.1 A3A4SIDE2.3 A3A4SIDE2.5 A3A4SIDE2.7 A3A4SIDE2.9 A3A4SIDE2.11 A3A4SIDE2.13 A3A4SIDE2.15 A3A4SIDE2.17 A3A4SIDE2.19 A3A4SIDE2.21 A3A4SIDE2.23 A3A4SIDE2.25 A3A4SIDE2.27 A3A4SIDE2.29 A3A4SIDE2.31 A3A4SIDE2.33 A4.C2
N$146: A3.A2 A3A4SIDE2.2 A4.A2
N$147: A3.B2 A3A4SIDE2.4 A4.B2
N$148: A3.D2 A3A4SIDE2.6 A4.D2
N$149: A3.E2 A3A4SIDE2.8 A4.E2
N$150: A3.F2 A3A4SIDE2.10 A4.F2
N$151: A3.H2 A3A4SIDE2.12 A4.H2
N$152: A3.J2 A3A4SIDE2.14 A4.J2
N$153: A3.K2 A3A4SIDE2.16 A4.K2
N$154: A3.L2 A3A4SIDE2.18 A4.L2
N$155: A3.M2 A3A4SIDE2.20 A4.M2
N$156: A3.N2 A3A4SIDE2.22 A4.N2
N$157: A3.P2 A3A4SIDE2.24 A4.P2
N$158: A3.R2 A3A4SIDE2.26 A4.R2
N$159: A3.S2 A3A4SIDE2.28 A4.S2
N$160: A3.T2 A3A4SIDE2.30 A4.T2
N$161: A3.U2 A3A4SIDE2.34 A4.U2
N$162: A3.V2 A3A4SIDE2.32 A4.V2
N$163: A3.A1 A3A4SIDE1.10 A4.A1
N$164: A3.B1 A3A4SIDE1.6 A4.B1
N$165: A3.D1 A3A4SIDE1.8 A4.D1
N$166: A3.E1 A3A4SIDE1.12 A4.E1
N$167: A3.F1 A3A4SIDE1.14 A4.F1
N$168: A3.H1 A3A4SIDE1.16 A4.H1
N$169: A3.J1 A3A4SIDE1.20 A4.J1
N$170: A3.K1 A3A4SIDE1.18 A4.K1
N$171: A3.L1 A3A4SIDE1.24 A4.L1
N$172: A3.M1 A3A4SIDE1.28 A4.M1
N$173: A3.N1 A3A4SIDE1.22 A4.N1
N$174: A3.P1 A3A4SIDE1.30 A4.P1
N$175: A3.R1 A3A4SIDE1.26 A4.R1
N$176: A3.S1 A3A4SIDE1.32 A4.S1
N$177: A3.T1 A3A4SIDE1.34 A4.T1
N$178: A3.U1 A3A4SIDE1.4 A4.U1
N$179: A3.V1 A3A4SIDE1.2 A4.V1
N$180: A3.C1 A3A4SIDE1.1 A3A4SIDE1.3 A3A4SIDE1.5 A3A4SIDE1.7 A3A4SIDE1.9 A3A4SIDE1.11 A3A4SIDE1.13 A3A4SIDE1.15 A3A4SIDE1.17 A3A4SIDE1.19 A3A4SIDE1.21 A3A4SIDE1.23 A3A4SIDE1.25 A3A4SIDE1.27 A3A4SIDE1.29 A3A4SIDE1.31 A3A4SIDE1.33 A4.C1
N$181: IC8.12 OUT7-8.16
N$182: IC7.1 OUT7-8.1 RN2.9
N$183: IC7.10 OUT7-8.5 RN2.7
N$184: IC8.5 OUT7-8.12
N$185: IC8.13 OUT7-8.15 RN2.2
N$186: IC10.1 OUT1-1.1 RN7.9
N$187: IC10.10 OUT1-1.5 RN7.7
N$188: IC11.5 OUT1-1.12
N$189: IC11.13 OUT1-1.15 RN7.2
N$190: IC12.4 OUT5-1.3 RN8.8
N$191: IC12.13 OUT5-1.7 RN8.6
N$192: IC12.2 OUT5-1.2
N$193: IC12.5 OUT5-1.4
N$194: IC12.9 OUT5-1.6
N$195: IC12.12 OUT5-1.8
N$196: IC13.10 OUT5-1.13 RN8.3
N$197: IC13.4 OUT5-1.11 RN8.4
N$198: IC13.1 OUT5-1.9 RN8.5
N$199: IC13.2 OUT5-1.10
N$200: IC13.9 OUT5-1.14
N$201: IC13.12 OUT5-1.16
N$202: IC12.1 OUT5-1.1 RN8.9
N$203: IC12.10 OUT5-1.5 RN8.7
N$204: IC13.5 OUT5-1.12
N$205: IC13.13 OUT5-1.15 RN8.2
N$206: IC14.4 OUT3-1.3 RN5.8
N$207: IC14.13 OUT3-1.7 RN5.6
N$208: IC14.2 OUT3-1.2
N$209: IC14.5 OUT3-1.4
N$210: IC14.9 OUT3-1.6
N$211: IC14.12 OUT3-1.8
N$212: IC15.10 OUT3-1.13 RN5.3
N$213: IC15.4 OUT3-1.11 RN5.4
N$214: IC15.1 OUT3-1.9 RN5.5
N$215: IC15.2 OUT3-1.10
N$216: IC15.9 OUT3-1.14
N$217: IC15.12 OUT3-1.16
N$218: IC14.1 OUT3-1.1 RN5.9
N$219: IC14.10 OUT3-1.5 RN5.7
N$220: IC15.5 OUT3-1.12
N$221: IC15.13 OUT3-1.15 RN5.2
N$222: IC16.4 OUT7-1.3 RN6.8
N$223: IC16.13 OUT7-1.7 RN6.6
N$224: IC16.2 OUT7-1.2
N$225: IC16.5 OUT7-1.4
N$226: IC16.9 OUT7-1.6
N$227: IC16.12 OUT7-1.8
N$228: IC17.10 OUT7-1.13 RN6.3
N$229: IC17.4 OUT7-1.11 RN6.4
N$230: IC17.1 OUT7-1.9 RN6.5
N$231: IC17.2 OUT7-1.10
N$232: IC17.9 OUT7-1.14
N$233: IC17.12 OUT7-1.16
N$234: IC16.1 OUT7-1.1 RN6.9
N$235: IC16.10 OUT7-1.5 RN6.7
N$236: IC17.5 OUT7-1.12
N$237: IC17.13 OUT7-1.15 RN6.2
N$238: C2.1 IC18.11 R2.1
N$239: D1.C D2.A E1.2 R15.2 R17.1
N$240: D1.A D2.C D3.C D4.A E1.3 R16.2
N$241: C4.2 E1.1
N$242: E1.8 R18.1
N$243: C3.2 E1.5
N$244: C4.1 R18.2
N$245: D6.A R20.2 R43.A
N$246: E2.3 R43.S
N$247: D7.C R21.1 R43.E
N$248: C9.1 R22.2
N$249: C9.2 E2.1
N$250: E2.8 R22.1
N$251: C10.2 E2.5
N$252: C7.1 R23.2
N$253: B3.C2 B3B4SIDE2.1 B3B4SIDE2.3 B3B4SIDE2.5 B3B4SIDE2.7 B3B4SIDE2.9 B3B4SIDE2.11 B3B4SIDE2.13 B3B4SIDE2.15 B3B4SIDE2.17 B3B4SIDE2.19 B3B4SIDE2.21 B3B4SIDE2.23 B3B4SIDE2.25 B3B4SIDE2.27 B3B4SIDE2.29 B3B4SIDE2.31 B3B4SIDE2.33 B4.C2
N$254: B3.A2 B3B4SIDE2.2 B4.A2
N$255: B3.B2 B3B4SIDE2.4 B4.B2
N$256: B3.D2 B3B4SIDE2.6 B4.D2
N$257: B3.E2 B3B4SIDE2.8 B4.E2
N$258: B3.F2 B3B4SIDE2.10 B4.F2
N$259: B3.H2 B3B4SIDE2.12 B4.H2
N$260: B3.J2 B3B4SIDE2.14 B4.J2
N$261: B3.K2 B3B4SIDE2.16 B4.K2
N$262: B3.L2 B3B4SIDE2.18 B4.L2
N$263: B3.M2 B3B4SIDE2.20 B4.M2
N$264: B3.N2 B3B4SIDE2.22 B4.N2
N$265: B3.P2 B3B4SIDE2.24 B4.P2
N$266: B3.R2 B3B4SIDE2.26 B4.R2
N$267: B3.S2 B3B4SIDE2.28 B4.S2
N$268: B3.T2 B3B4SIDE2.30 B4.T2
N$269: B3.U2 B3B4SIDE2.34 B4.U2
N$270: B3.V2 B3B4SIDE2.32 B4.V2
N$271: B3.A1 B3B4SIDE1.10 B4.A1
N$272: B3.B1 B3B4SIDE1.6 B4.B1
N$273: B3.D1 B3B4SIDE1.8 B4.D1
N$274: B3.E1 B3B4SIDE1.12 B4.E1
N$275: B3.F1 B3B4SIDE1.14 B4.F1
N$276: B3.H1 B3B4SIDE1.16 B4.H1
N$277: B3.J1 B3B4SIDE1.20 B4.J1
N$278: B3.K1 B3B4SIDE1.18 B4.K1
N$279: B3.L1 B3B4SIDE1.24 B4.L1
N$280: B3.M1 B3B4SIDE1.28 B4.M1
N$281: B3.N1 B3B4SIDE1.22 B4.N1
N$282: B3.P1 B3B4SIDE1.30 B4.P1
N$283: B3.R1 B3B4SIDE1.26 B4.R1
N$284: B3.S1 B3B4SIDE1.32 B4.S1
N$285: B3.T1 B3B4SIDE1.34 B4.T1
N$286: B3.U1 B3B4SIDE1.4 B4.U1
N$287: B3.V1 B3B4SIDE1.2 B4.V1
N$288: B3.C1 B3B4SIDE1.1 B3B4SIDE1.3 B3B4SIDE1.5 B3B4SIDE1.7 B3B4SIDE1.9 B3B4SIDE1.11 B3B4SIDE1.13 B3B4SIDE1.15 B3B4SIDE1.17 B3B4SIDE1.19 B3B4SIDE1.21 B3B4SIDE1.23 B3B4SIDE1.25 B3B4SIDE1.27 B3B4SIDE1.29 B3B4SIDE1.31 B3B4SIDE1.33 B4.C1
N$289: D9.C D11.A
N$290: D8.A D10.C
N$291: C10.1 D10.A D11.C D12.C E2.6 J7.1 J7.2 R24.2
N$292: C11.2 D8.C D9.A E2.2 J6.1 J6.2 R23.1 R24.1
N$293: C11.1 R26.1
N$294: D12.A Q1.2 R25.2
N$295: J3.1 Q1.3 R26.2 R27.2 R28.1
N$296: D17.A Q3.1 Q5.1 R37.1
N$297: C12.1 D14.C Q2.1 Q4.1 R33.1
N$298: D13.C D14.A
N$299: D16.A R34.1 R35.2
N$300: C15.2 Q2.3 R34.2 R36.1
N$301: C15.1 Q3.2 R35.1
N$302: D19.A R39.2 R40.1
N$303: C13.1 Q4.3 R38.2 R39.1
N$304: C13.2 Q5.2 R40.2
N$305: D15.C D16.C Q3.3
N$306: D19.C D20.C Q5.3
N$307: D17.C D18.A
N$308: D15.A R41.2
N$309: D20.A R42.1
N$310: E3.12 J2.2
N$311: Q2.2 R29.1
N$312: Q4.2 R30.2
N$313: J1.1 U$11.B2
N$314: E3.1 E3.2 J3.2
OA1: A1-K1.18 IC1.3 JP1.1
OA2: A1-K2.18 IC10.3 JP6.1
OB1: A1-K1.17 IC1.6 JP1.2
OB2: A2-K2.17 JP2.2
OB3: A1-K2.17 IC10.6 JP6.2
OB4: A2-K1.17 JP7.2
OC: IC9.5 IC9.8 IN5-6.1 OC.1
OC1: A1-K1.16 IC1.8 JP1.3
OC2: A1-K2.16 IC10.8 JP6.3
OC3: IC18.5 IC18.8 IN5-1.1 OC1.1
OD1: A1-K1.15 IC1.11 JP1.4
OD2: A2-K2.15 IC5.6 JP2.4
OD3: A1-K2.15 IC10.11 JP6.4
OD4: A2-K1.15 IC12.6 JP7.4
OE1: A1-K1.14 IC2.3 JP1.5
OE2: A2-K2.14 IC5.8 JP2.5
OE3: A1-K2.14 IC11.3 JP6.5
OE4: A2-K1.14 IC12.8 JP7.5
OF1: A1-K1.13 IC2.6 JP1.6
OF2: A2-K2.13 IC5.11 JP2.6
OF3: A1-K2.13 IC11.6 JP6.6
OF4: A2-K1.13 IC12.11 JP7.6
OH1: A1-K1.12 IC2.8 JP1.7
OH2: A2-K2.12 IC6.3 JP2.7
OH3: A1-K2.12 IC11.8 JP6.7
OH4: A2-K1.12 IC13.3 JP7.7
OJ1: A1-K1.11 IC2.11 JP1.8
OJ2: A2-K2.11 IC6.6 JP2.8
OJ3: A1-K2.11 IC11.11 JP6.8
OJ4: A2-K1.11 IC13.6 JP7.8
OK1: A1-K1.10 IC3.3 JP1.9
OK2: A2-K2.10 IC6.8 JP2.9
OK3: A1-K2.10 IC14.3 JP6.9
OK4: A2-K1.10 IC13.8 JP7.9
OL1: IC3.6 JP1.10 L1-V1.18
OL2: IC6.11 JP2.10 L2-V2.18
OL3: IC14.6 JP6.10 L1-V2.18
OL4: IC13.11 JP7.10 L2-V1.18
OM1: IC3.8 JP1.11 L1-V1.17
OM2: IC7.3 JP2.11 L2-V2.17
OM3: IC14.8 JP6.11 L1-V2.17
OM4: IC16.3 JP7.11 L2-V1.17
ON1: IC3.11 JP1.12 L1-V1.16
ON2: IC7.6 JP2.12 L2-V2.16
ON3: IC14.11 JP6.12 L1-V2.16
ON4: IC16.6 JP7.12 L2-V1.16
OP1: IC4.3 JP1.13 L1-V1.15
OP2: IC7.8 JP2.13 L2-V2.15
OP3: IC15.3 JP6.13 L1-V2.15
OP4: IC16.8 JP7.13 L2-V1.15
OR1: IC4.6 JP1.14 L1-V1.14
OR2: IC7.11 JP2.14 L2-V2.14
OR3: IC15.6 JP6.14 L1-V2.14
OR4: IC16.11 JP7.14 L2-V1.14
OS1: IC4.8 JP1.15 L1-V1.13
OS2: IC8.3 JP2.15 L2-V2.13
OS3: IC15.8 JP6.15 L1-V2.13
OS4: IC17.3 JP7.15 L2-V1.13
OT1: IC17.6 JP7.16 L2-V1.12
OT2: IC8.6 JP2.16 L2-V2.12
OU1: IC4.11 JP1.17 L1-V1.11
OU2: IC8.8 JP2.17 L2-V2.11
OU3: IC15.11 JP6.17 L1-V2.11
OU4: IC17.8 JP7.17 L2-V1.11
OV1: IC5.3 JP1.18 L1-V1.10
OV2: IC8.11 JP2.18 L2-V2.10
OV3: IC12.3 JP6.18 L1-V2.10
OV4: IC17.11 JP7.18 L2-V1.10
P: E3.9 U$11.P2
P1: IN1-2.10 JP3.13 L1-V1.4 SIDE1.30
P2: IN3-4.13 JP4.13 L2-V2.4 SIDE2.24
P3: IN1-1.10 JP5.13 L1-V2.4 SIDE4.30
P4: IN3-1.13 JP8.13 L2-V1.4 SIDE3.24
R: E3.10 E3.13 U$11.R2
R1: IN1-2.12 JP3.14 L1-V1.5 SIDE1.26
R2: IN3-4.15 JP4.14 L2-V2.5 SIDE2.26
R3: IN3-1.15 JP8.14 L2-V1.5 SIDE3.26
R4: IN1-1.12 JP5.14 L1-V2.5 SIDE4.26
ROW1: IC19.6 PAD1.1
ROW2: IC19.7 PAD2.1
ROW3: IC19.8 PAD11.1
ROW4: IC19.9 PAD10.1
ROW5: IC19.10 PAD8.1
ROW6: IC19.11 PAD5.1
ROW7: IC19.12 PAD6.1
ROW8: IC20.6 PAD13.1
ROW9: IC20.7 PAD14.1
ROW10: IC20.11 PAD19.1
ROW11: IC20.12 PAD18.1
ROW12: IC20.8 PAD25.1
ROW13: IC20.9 PAD26.1
ROW14: IC20.10 PAD22.1
S1: IN1-2.14 JP3.15 L1-V1.6 SIDE1.32
S2: IN3-4.10 JP4.15 L2-V2.6 SIDE2.28
S3: IN1-1.14 JP5.15 L1-V2.6 SIDE4.32
S4: IN3-1.10 JP8.15 L2-V1.6 SIDE3.28
STEM\: IC19.4 PAD15.1 R8.1
STEM\1: IC20.4 PAD27.1 R14.1
T1: JP3.16 L1-V1.7 SIDE1.34
T2: IN3-4.12 JP4.16 L2-V2.7 SIDE2.30
T3: IN3-1.12 JP8.16 L2-V1.7 SIDE3.30
T4: JP5.16 L1-V2.7 SIDE4.34
U: E3.3 E3.4 E3.5 U$11.U2
U1: IN1-2.16 JP3.17 L1-V1.8 SIDE1.4
U2: IN3-4.14 JP4.17 L2-V2.8 SIDE2.34
U3: IN3-1.14 JP8.17 L2-V1.8 SIDE3.34
U4: IN1-1.16 JP5.17 L1-V2.8 SIDE4.4
V: E3.6 U$11.V2
V1: IN3-4.1 JP3.18 L1-V1.9 SIDE1.2
V2: IN3-4.16 JP4.18 L2-V2.9 SIDE2.32
V3: IN3-1.16 JP8.18 L2-V1.9 SIDE3.32
V4: IN3-1.1 JP5.18 L1-V2.9 SIDE4.2
V+: C6.1 C8.1 C14.1 D13.A E1.7 E2.7 E3.14 R20.1 R25.1 R27.1 R31.1 R32.1 U$11.A2
V-: C5.1 C16.2 D5.A E1.4 E2.4 R19.2 R21.2
VCC [Power]: A2-K2.18 BYP1.1 BYP2.1 BYP3.1 BYP4.1 BYP5.1 BYP6.1 BYP7.1 BYP8.1 BYP9.1 BYP10.1 IC1.14 IC2.14 IC3.14 IC4.14 IC5.14 IC6.14 IC7.14 IC8.14 IC9.1 IC9.2 IC9.3 IC9.13 IC9.14 JP2.1 POWER2.2 POWER.2 RN1.1 RN2.1 RN3.1 RN4.1
VCC1 [Power]: A2-K1.18 BYP11.1 BYP12.1 BYP13.1 BYP14.1 BYP15.1 BYP16.1 BYP17.1 BYP18.1 BYP19.1 BYP20.1 IC10.14 IC11.14 IC12.14 IC13.14 IC14.14 IC15.14 IC16.14 IC17.14 IC18.1 IC18.2 IC18.3 IC18.13 IC18.14 JP7.1 POWER1.2 POWER3.2 RN5.1 RN6.1 RN7.1 RN8.1
VCC2: IC19.14 PAD16.1
VCC3: IC20.14 PAD28.1

## Tracks (layer width: path | path; a pad name or v marks a point on that pad's centre or on a via)
-15V
  Bottom 0.254: D18.C 151.76,11.43 150.5,12.7 R38.1 149.86,13.34 149.86,14.61 R36.2 149.86,15.88 148.59,17.14 148.59,18.41 149.22,19.05 165.74,19.05 169.54,15.24 170.81,15.24 175.9,20.32 197.49,20.32 | 197.49,20.32 200.03,17.78 200.66,17.14 201.29,17.78 203.84,17.78 225.43,39.37 225.43,54.61 223.52,56.52 J1.2 | 197.49,20.32 193.68,24.13 188.59,24.13 R19.1
A1  (via drill 0.61)
  Top 0.254: A1-K1.1 67.94,197.49 66.67,196.22 64.14,196.22 JP3.1 | v47.62,193.04 15.88,193.04 15.24,193.68 7.62,193.68 6.35,192.41 IN1-2.1
  Bottom 0.254: v47.62,193.04 50.8,189.87 53.98,189.87 53.98,189.23 | 53.98,189.23 SIDE1.10 53.98,189.23 | 53.98,189.23 55.88,191.13 55.88,196.22 61.59,196.22 JP3.1
A2
  Top 0.254: A2-K2.1 28.57,164.47 27.3,163.19 24.77,163.19 JP4.1 22.23,163.19 19.05,163.19 17.78,161.93 SIDE2.2
  Bottom 0.254: R1.2 24.77,190.5 23.5,189.23 23.5,163.83 JP4.1
A3  (via drill 0.61)
  Top 0.254: A1-K2.1 67.94,104.78 66.67,103.5 64.14,103.5 JP5.1 | v47.62,100.33 15.88,100.33 15.24,100.97 7.62,100.97 6.35,99.69 IN1-1.1
  Bottom 0.254: v47.62,100.33 50.8,97.16 53.98,97.16 53.98,96.52 | 53.98,96.52 SIDE4.10 53.98,96.52 | 53.98,96.52 55.88,98.42 55.88,103.5 61.59,103.5 JP5.1
A4
  Top 0.254: A2-K1.1 28.57,71.75 27.3,70.48 24.77,70.48 JP8.1 22.23,70.48 19.05,70.48 17.78,69.22 SIDE3.2
  Bottom 0.254: R2.2 24.77,97.79 23.5,96.52 23.5,71.12 JP8.1
B1  (via drill 0.61)
  Top 0.254: A1-K1.2 67.94,194.94 66.67,193.68 64.14,193.68 JP3.2 | SIDE1.6 54.61,193.68 61.59,193.68 JP3.2 | v15.88,198.75 16.51,198.12 50.16,198.12 50.8,197.49 58.42,197.49 61.59,194.31 62.23,194.31 JP3.2
  Bottom 0.254: v15.88,198.75 10.16,198.75 6.99,195.58 6.99,191.77 5.71,190.5 IN1-2.3
B2
  Top 0.254: A2-K2.2 28.57,161.93 27.3,160.66 24.77,160.66 JP4.2 22.23,160.66 19.05,160.66 17.78,159.38 SIDE2.4
B3  (via drill 0.61)
  Top 0.254: A1-K2.2 67.94,102.23 66.67,100.97 64.14,100.97 JP5.2 | SIDE4.6 54.61,100.97 61.59,100.97 JP5.2 | v15.88,106.05 16.51,105.41 50.16,105.41 50.8,104.78 58.42,104.78 61.59,101.6 62.23,101.6 JP5.2
  Bottom 0.254: v15.88,106.05 10.16,106.05 6.99,102.87 6.99,99.06 5.71,97.79 IN1-1.3
B4
  Top 0.254: A2-K1.2 28.57,69.22 27.3,67.94 24.77,67.94 JP8.2 22.23,67.94 19.05,67.94 17.78,66.67 SIDE3.4
C1  (via drill 0.61)
  Top 0.254: A1-K1.3 67.94,192.41 66.67,191.13 64.14,191.13 JP3.3 61.59,191.13 60.33,192.41 51.44,192.41 | v10.16,194.94 12.7,197.49 49.53,197.49 50.8,196.22 SIDE1.3 51.44,195.58 51.44,194.31 SIDE1.5 51.44,193.04 51.44,192.41 | 51.44,192.41 51.44,191.77 SIDE1.7 51.44,190.5 51.44,189.23 SIDE1.9 51.44,187.96 51.44,186.69 SIDE1.11 | SIDE1.19 51.44,176.53 51.44,177.8 SIDE1.17 | SIDE1.23 51.44,171.45 51.44,172.72 SIDE1.21 | SIDE1.25 51.44,167.64 51.44,166.37 SIDE1.27 51.44,165.1 51.44,163.83 SIDE1.29
  Bottom 0.254: v10.16,194.94 10.16,188.59 7.62,188.59 6.35,187.32 IN1-2.5 | SIDE1.1 51.44,198.12 51.44,196.85 SIDE1.3 | SIDE1.11 51.44,185.42 51.44,184.15 SIDE1.13 51.44,182.88 51.44,181.61 SIDE1.15 51.44,180.34 51.44,179.07 SIDE1.17 | SIDE1.21 51.44,173.99 51.44,175.26 SIDE1.19 | SIDE1.25 51.44,168.91 51.44,170.18 SIDE1.23 | SIDE1.29 51.44,162.56 51.44,161.29 SIDE1.31 51.44,160.02 51.44,158.75 SIDE1.33
C1\  (via drill 0.61)
  Top 0.254: v243.21,73.03 241.94,71.75 236.85,71.75 236.85,73.03 R3.1
  Bottom 0.254: v243.21,73.03 248.28,73.03 IC19.17
C1\1  (via drill 0.61)
  Top 0.254: v243.21,185.42 241.94,184.15 236.85,184.15 236.85,185.42 R9.1
  Bottom 0.254: v243.21,185.42 248.28,185.42 IC20.17
C2
  Top 0.254: A2-K2.3 28.57,159.38 27.3,158.12 24.77,158.12 JP4.3 22.23,158.12 14.61,158.12 | SIDE2.1 14.61,161.29 14.61,160.02 SIDE2.3 14.61,158.75 14.61,158.12 | 14.61,158.12 14.61,157.48 SIDE2.5 14.61,156.21 14.61,154.94 SIDE2.7 14.61,153.67 14.61,152.4 SIDE2.9 | SIDE2.13 14.61,147.32 14.61,148.59 SIDE2.11 | SIDE2.15 14.61,143.51 14.61,142.24 SIDE2.17 14.61,140.97 14.61,139.7 SIDE2.19 14.61,138.43 14.61,137.16 SIDE2.21 14.61,135.89 14.61,134.62 SIDE2.23 | SIDE2.25 14.61,130.81 14.61,129.54 SIDE2.27 14.61,128.27 14.61,127 SIDE2.29 14.61,125.73 14.61,124.46 SIDE2.31 14.61,123.19 14.61,121.92 SIDE2.33
  Bottom 0.254: SIDE2.11 14.61,149.86 14.61,151.13 SIDE2.9 | SIDE2.15 14.61,144.78 14.61,146.05 SIDE2.13 | SIDE2.25 14.61,132.08 14.61,133.35 SIDE2.23
C2\  (via drill 0.61)
  Top 0.254: v244.47,71.12 243.84,70.48 243.84,69.22 243.21,68.58 234.95,68.58 234.95,77.47 R4.1
  Bottom 0.254: v244.47,71.12 247.65,71.12 248.28,71.75 IC19.18
C2\1  (via drill 0.61)
  Top 0.254: v244.47,183.51 243.84,182.88 243.84,181.61 243.21,180.97 234.95,180.97 234.95,189.87 R10.1
  Bottom 0.254: v244.47,183.51 247.65,183.51 248.28,184.15 IC20.18
C3  (via drill 0.61)
  Top 0.254: A1-K2.3 67.94,99.69 66.67,98.42 64.14,98.42 JP5.3 61.59,98.42 60.33,99.69 51.44,99.69 | v10.16,102.23 12.7,104.78 49.53,104.78 50.8,103.5 SIDE4.3 51.44,102.87 51.44,101.6 SIDE4.5 51.44,100.33 51.44,99.69 | 51.44,99.69 51.44,99.06 SIDE4.7 51.44,97.79 51.44,96.52 SIDE4.9 51.44,95.25 51.44,93.98 SIDE4.11 | SIDE4.19 51.44,83.82 51.44,85.09 SIDE4.17 | SIDE4.23 51.44,78.74 51.44,80.01 SIDE4.21 | SIDE4.25 51.44,74.93 51.44,73.66 SIDE4.27 51.44,72.39 51.44,71.12 SIDE4.29
  Bottom 0.254: v10.16,102.23 10.16,95.89 7.62,95.89 6.35,94.61 IN1-1.5 | SIDE4.1 51.44,105.41 51.44,104.14 SIDE4.3 | SIDE4.11 51.44,92.71 51.44,91.44 SIDE4.13 51.44,90.17 51.44,88.9 SIDE4.15 51.44,87.63 51.44,86.36 SIDE4.17 | SIDE4.21 51.44,81.28 51.44,82.55 SIDE4.19 | SIDE4.25 51.44,76.2 51.44,77.47 SIDE4.23 | SIDE4.29 51.44,69.85 51.44,68.58 SIDE4.31 51.44,67.31 51.44,66.04 SIDE4.33
C3\  (via drill 0.61)
  Top 0.254: v245.11,68.58 246.38,68.58 R5.1
  Bottom 0.254: v245.11,68.58 239.4,68.58 239.4,71.75 IC19.1
C3\1  (via drill 0.61)
  Top 0.254: v245.11,180.97 246.38,180.97 R11.1
  Bottom 0.254: v245.11,180.97 239.4,180.97 239.4,184.15 IC20.1
C4
  Top 0.254: A2-K1.3 28.57,66.67 27.3,65.41 24.77,65.41 JP8.3 22.23,65.41 14.61,65.41 | SIDE3.1 14.61,68.58 14.61,67.31 SIDE3.3 14.61,66.04 14.61,65.41 | 14.61,65.41 14.61,64.77 SIDE3.5 14.61,63.5 14.61,62.23 SIDE3.7 14.61,60.96 14.61,59.69 SIDE3.9 | SIDE3.13 14.61,54.61 14.61,55.88 SIDE3.11 | SIDE3.15 14.61,50.8 14.61,49.53 SIDE3.17 14.61,48.26 14.61,46.99 SIDE3.19 14.61,45.72 14.61,44.45 SIDE3.21 14.61,43.18 14.61,41.91 SIDE3.23 | SIDE3.25 14.61,38.1 14.61,36.83 SIDE3.27 14.61,35.56 14.61,34.29 SIDE3.29 14.61,33.02 14.61,31.75 SIDE3.31 14.61,30.48 14.61,29.21 SIDE3.33
  Bottom 0.254: SIDE3.11 14.61,57.15 14.61,58.42 SIDE3.9 | SIDE3.15 14.61,52.07 14.61,53.34 SIDE3.13 | SIDE3.25 14.61,39.37 14.61,40.64 SIDE3.23
C4\  (via drill 0.61)
  Top 0.254: v245.75,74.3 250.82,74.3 R6.1
  Bottom 0.254: v245.75,74.3 242.57,74.3 241.3,73.03 239.4,73.03 IC19.2
C4\1  (via drill 0.61)
  Top 0.254: v245.75,186.69 250.82,186.69 R12.1
  Bottom 0.254: v245.75,186.69 242.57,186.69 241.3,185.42 239.4,185.42 IC20.2
C5\  (via drill 0.61)
  Top 0.254: v250.19,67.31 252.73,69.85 252.73,81.28 252.09,81.92 R7.1
  Bottom 0.254: v250.19,67.31 237.49,67.31 237.49,73.66 238.12,74.3 238.76,74.3 IC19.3
C5\1  (via drill 0.61)
  Top 0.254: v250.19,179.71 252.73,182.25 252.73,193.68 252.09,194.31 R13.1
  Bottom 0.254: v250.19,179.71 237.49,179.71 237.49,186.06 238.12,186.69 238.76,186.69 IC20.3
COL1\
  Top 0.254: R3.2 236.85,75.56 239.4,75.56 PAD4.1
COL1\1
  Top 0.254: R9.2 236.85,187.96 239.4,187.96 PAD20.1
COL2\
  Top 0.254: R4.2 237.49,78.11 239.4,78.11 PAD3.1
COL2\1
  Top 0.254: R10.2 237.49,190.5 239.4,190.5 PAD17.1
COL3\
  Top 0.254: R5.2 248.28,68.58 248.28,70.48 PAD7.1
COL3\1
  Top 0.254: R11.2 248.28,180.97 248.28,182.88 PAD21.1
COL4\
  Top 0.254: R6.2 250.82,76.2 248.28,76.2 248.28,75.56 PAD9.1
COL4\1
  Top 0.254: R12.2 250.82,188.59 248.28,188.59 248.28,187.96 PAD23.1
COL5\
  Top 0.254: R7.2 250.82,83.82 248.28,83.82 248.28,83.19 PAD12.1
COL5\1
  Top 0.254: R13.2 250.82,196.22 248.28,196.22 248.28,195.58 PAD24.1
D
  Bottom 0.254: 240.03,47.62 239.4,46.99 234.31,46.99 R15.1
  Bottom 0.305: U$11.D2 240.03,47.62
D1  (via drill 0.61)
  Top 0.254: A1-K1.4 67.94,189.87 66.67,188.59 64.14,188.59 JP3.4 61.59,188.59 59.05,191.13 54.61,191.13 SIDE1.8 | v14.61,186.06 7.62,186.06 6.35,184.78 IN1-2.7
  Bottom 0.254: v14.61,186.06 18.41,189.87 18.41,191.77 26.67,200.03 52.7,200.03 52.7,198.12 53.34,197.49 55.24,197.49 55.24,193.04 53.98,191.77 SIDE1.8
D2  (via drill 0.61)
  Top 0.254: A2-K2.4 28.57,156.84 27.3,155.57 24.77,155.57 JP4.4 22.23,155.57 20.95,156.84 17.78,156.84 SIDE2.6 | v15.88,163.19 7.62,163.19 6.35,164.47 IN3-4.3
  Bottom 0.254: v15.88,163.19 15.88,158.75 17.14,157.48 SIDE2.6
D3  (via drill 0.61)
  Top 0.254: A1-K2.4 67.94,97.16 66.67,95.89 64.14,95.89 JP5.4 61.59,95.89 59.05,98.42 54.61,98.42 SIDE4.8 | v14.61,93.34 7.62,93.34 6.35,92.08 IN1-1.7
  Bottom 0.254: v14.61,93.34 18.41,97.16 18.41,99.06 26.67,107.31 52.7,107.31 52.7,105.41 53.34,104.78 55.24,104.78 55.24,100.33 53.98,99.06 SIDE4.8
D4  (via drill 0.61)
  Top 0.254: A2-K1.4 28.57,64.14 27.3,62.87 24.77,62.87 JP8.4 22.23,62.87 20.95,64.14 17.78,64.14 SIDE3.6 | v15.88,70.48 7.62,70.48 6.35,71.75 IN3-1.3
  Bottom 0.254: v15.88,70.48 15.88,66.04 17.14,64.77 SIDE3.6
E
  Bottom 0.254: 240.03,44.45 234.31,44.45 R16.1
  Bottom 0.305: U$11.E2 240.03,44.45
E1  (via drill 0.61)
  Top 0.254: v8.89,195.58 13.34,200.03 69.22,200.03 71.12,198.12 71.12,187.32 70.48,187.32 A1-K1.5 67.94,187.32 66.67,186.06 64.14,186.06 JP3.5 61.59,186.06 54.61,186.06 SIDE1.12
  Bottom 0.254: v8.89,195.58 8.89,193.68 8.26,193.04 IN1-2.2
E2
  Top 0.254: A2-K2.5 28.57,154.31 27.3,153.03 24.77,153.03 JP4.5 22.23,153.03 20.95,154.31 17.78,154.31 SIDE2.8 16.51,154.31 15.88,154.31 15.88,151.13 15.24,150.5 13.34,150.5 13.34,159.38 12.06,160.66 7.62,160.66 6.35,161.93 IN3-4.5
E3  (via drill 0.61)
  Top 0.254: v8.89,102.87 13.34,107.31 69.22,107.31 71.12,105.41 71.12,94.61 70.48,94.61 A1-K2.5 67.94,94.61 66.67,93.34 64.14,93.34 JP5.5 61.59,93.34 54.61,93.34 SIDE4.12
  Bottom 0.254: v8.89,102.87 8.89,100.97 8.26,100.33 IN1-1.2
E4
  Top 0.254: A2-K1.5 28.57,61.59 27.3,60.33 24.77,60.33 JP8.5 22.23,60.33 20.95,61.59 17.78,61.59 SIDE3.8 16.51,61.59 15.88,61.59 15.88,58.42 15.24,57.78 13.34,57.78 13.34,66.67 12.06,67.94 7.62,67.94 6.35,69.22 IN3-1.5
F1  (via drill 0.61)
  Top 0.254: A1-K1.6 67.94,184.78 66.67,183.51 64.14,183.51 JP3.6 61.59,183.51 54.61,183.51 SIDE1.14 53.34,183.51 52.07,182.25 50.16,182.25 v46.35,186.06 | v20.32,189.87 8.89,189.87 IN1-2.4
  Bottom 0.254: v20.32,189.87 22.86,192.41 22.86,193.68 27.3,198.12 46.35,198.12 v46.35,186.06
F2  (via drill 0.61)
  Top 0.254: A2-K2.6 28.57,151.76 27.3,150.5 24.77,150.5 JP4.6 22.23,150.5 20.95,151.76 17.78,151.76 SIDE2.10 | v11.43,158.12 7.62,158.12 6.35,159.38 IN3-4.7
  Bottom 0.254: v11.43,158.12 13.97,155.57 15.88,155.57 15.88,153.67 17.14,152.4 SIDE2.10
F3  (via drill 0.61)
  Top 0.254: A2-K1.6 28.57,59.05 27.3,57.78 24.77,57.78 JP8.6 22.23,57.78 20.95,59.05 17.78,59.05 SIDE3.10 | v11.43,65.41 7.62,65.41 6.35,66.67 IN3-1.7
  Bottom 0.254: v11.43,65.41 13.97,62.87 15.88,62.87 15.88,60.96 17.14,59.69 SIDE3.10
F4  (via drill 0.61)
  Top 0.254: A1-K2.6 67.94,92.08 66.67,90.81 64.14,90.81 JP5.6 61.59,90.81 54.61,90.81 SIDE4.14 53.34,90.81 52.07,89.53 50.16,89.53 v46.35,93.34 | v20.32,97.16 8.89,97.16 IN1-1.4
  Bottom 0.254: v20.32,97.16 22.86,99.69 22.86,100.97 27.3,105.41 46.35,105.41 v46.35,93.34
GND  (via drill 0.61)
  Top 0.305: 113.67,132.08 113.67,132.72 100.33,132.72 99.69,132.08 99.69,131.44 IC6.7 | 113.67,132.08 113.67,128.91 114.3,128.27 116.2,128.27 116.84,128.91 BYP6.2 | 113.67,132.08 121.28,132.08 121.92,132.72 125.73,132.72 127,133.99 127,165.74 121.92,165.74 120.65,167 118.11,167 BYP3.2 | A2-K2.16 38.73,159.38 40.01,158.12 42.55,158.12 JP2.3 45.09,158.12 46.35,159.38 66.67,159.38 67.94,158.12 79.38,158.12 | BYP9.2 33.02,170.81 31.75,172.09 24.13,172.09 22.86,173.35 POWER2.1 20.32,173.35 17.14,173.35 POWER.1 | 78.11,156.84 79.38,158.12 | 79.38,158.12 81.92,158.12 JP1.16 | 78.11,156.84 L1-V1.12 78.11,156.84 | 78.11,156.84 98.42,156.84 99.06,156.21 IC4.7 | IC7.7 59.69,139.7 60.96,138.43 76.83,138.43 BYP7.2 | IC8.7 59.69,127 60.96,125.73 76.83,125.73 BYP8.2 | v99.69,190.5 100.33,191.13 115.57,191.13 116.84,192.41 BYP1.2
  Bottom 0.305: IC5.7 99.69,141.6 98.42,140.34 98.42,132.72 99.69,131.44 IC6.7 | BYP1.2 117.47,191.77 118.75,190.5 118.75,184.15 117.47,182.88 117.47,180.34 BYP2.2 117.47,179.07 118.75,177.8 118.75,168.91 | 118.75,168.91 117.47,167.64 BYP3.2 | 118.75,156.21 117.47,154.94 BYP4.2 | 118.75,168.91 118.75,156.21 | 118.75,156.21 118.75,143.51 117.47,142.24 BYP5.2 | C1.2 33.66,190.5 34.29,189.87 34.29,189.23 IC9.7 | GND.1 31.11,195.58 30.48,194.94 30.48,190.5 32.38,188.59 33.66,188.59 IC9.7 | BYP10.2 15.24,179.71 15.24,173.99 POWER.1 | A2-K2.16 36.83,160.02 33.66,163.19 33.66,170.18 BYP9.2 33.02,170.81 33.02,186.69 34.29,187.96 IC9.7 | 98.42,190.5 98.42,183.51 99.69,182.25 IC2.7 99.06,180.34 99.06,179.71 94.61,179.71 93.98,179.07 | 98.42,190.5 98.42,191.13 99.69,192.41 IC1.7 | 93.98,179.07 93.98,168.91 99.06,168.91 IC3.7 | IC7.7 59.05,139.06 57.78,137.79 57.78,130.18 59.05,128.91 IC8.7 | L1-V1.12 77.47,156.21 78.74,154.94 78.74,141.6 76.83,139.7 BYP7.2 | 93.98,179.07 87,179.07 87,180.34 85.09,182.25 80.01,182.25 80.01,160.02 81.92,158.12 JP1.16 | 98.42,190.5 v99.69,190.5
  pour Bottom: 0,203.2 128.27,203.2 128.27,113.03 0,113.03
  pour Top: 0,203.2 128.27,203.2 128.27,113.03 0,113.03
GND1  (via drill 0.61)
  Top 0.305: 113.67,39.37 113.67,40.01 100.33,40.01 99.69,39.37 99.69,38.73 IC13.7 | 113.67,39.37 113.67,36.2 114.3,35.56 116.2,35.56 116.84,36.2 BYP16.2 | 113.67,39.37 121.28,39.37 121.92,40.01 125.73,40.01 127,41.27 127,73.03 121.92,73.03 120.65,74.3 118.11,74.3 BYP13.2 | A2-K1.16 38.73,66.67 40.01,65.41 42.55,65.41 JP7.3 45.09,65.41 46.35,66.67 66.67,66.67 67.94,65.41 79.38,65.41 | BYP20.2 33.02,78.11 31.75,79.38 24.13,79.38 22.86,80.64 POWER3.1 20.32,80.64 17.14,80.64 POWER1.1 | 78.11,64.14 79.38,65.41 | 79.38,65.41 81.92,65.41 JP6.16 | 78.11,64.14 L1-V2.12 78.11,64.14 | 78.11,64.14 98.42,64.14 99.06,63.5 IC15.7 | IC16.7 59.69,46.99 60.96,45.72 76.83,45.72 BYP17.2 | IC17.7 59.69,34.29 60.96,33.02 76.83,33.02 BYP18.2 | v99.69,97.79 100.33,98.42 115.57,98.42 116.84,99.69 BYP11.2
  Bottom 0.305: IC12.7 99.69,48.9 98.42,47.62 98.42,40.01 99.69,38.73 IC13.7 | BYP11.2 117.47,99.06 118.75,97.79 118.75,91.44 117.47,90.17 117.47,87.63 BYP12.2 117.47,86.36 118.75,85.09 118.75,76.2 | 118.75,76.2 117.47,74.93 BYP13.2 | 118.75,63.5 117.47,62.23 BYP14.2 | 118.75,76.2 118.75,63.5 | 118.75,63.5 118.75,50.8 117.47,49.53 BYP15.2 | C2.2 33.66,97.79 34.29,97.16 34.29,96.52 IC18.7 | GND1.1 31.11,102.87 30.48,102.23 30.48,97.79 32.38,95.89 33.66,95.89 IC18.7 | BYP19.2 15.24,87 15.24,81.28 POWER1.1 | A2-K1.16 36.83,67.31 33.66,70.48 33.66,77.47 BYP20.2 33.02,78.11 33.02,93.98 34.29,95.25 IC18.7 | 98.42,97.79 98.42,90.81 99.69,89.53 IC11.7 99.06,87.63 99.06,87 94.61,87 93.98,86.36 | 98.42,97.79 98.42,98.42 99.69,99.69 IC10.7 | 93.98,86.36 93.98,76.2 99.06,76.2 IC14.7 | IC16.7 59.05,46.35 57.78,45.09 57.78,37.47 59.05,36.2 IC17.7 | L1-V2.12 77.47,63.5 78.74,62.23 78.74,48.9 76.83,46.99 BYP17.2 | 93.98,86.36 87,86.36 87,87.63 85.09,89.53 80.01,89.53 80.01,67.31 81.92,65.41 JP6.16 | 98.42,97.79 v99.69,97.79
  pour Bottom: 0,110.49 128.27,110.49 128.27,20.32 0,20.32
  pour Top: 0,110.49 128.27,110.49 128.27,20.32 0,20.32
GND2
  Bottom 0.254: IC19.5 239.4,76.83 240.03,76.83 241.3,78.11 241.3,85.09 R8.2
  pour Top: 233.04,64.77 254,64.77 254,90.81 233.04,90.81
  pour Bottom: 233.04,64.77 254,64.77 254,90.81 233.04,90.81
GND3
  Bottom 0.254: IC20.5 239.4,189.23 240.03,189.23 241.3,190.5 241.3,197.49 R14.2
  pour Top: 233.04,177.16 254,177.16 254,203.2 233.04,203.2
  pour Bottom: 233.04,177.16 254,177.16 254,203.2 233.04,203.2
GND4